# EAGLE board Venus_GPS_logger-sma-Panel-v10 (EAGLE 6.5.0), part 1 of 3
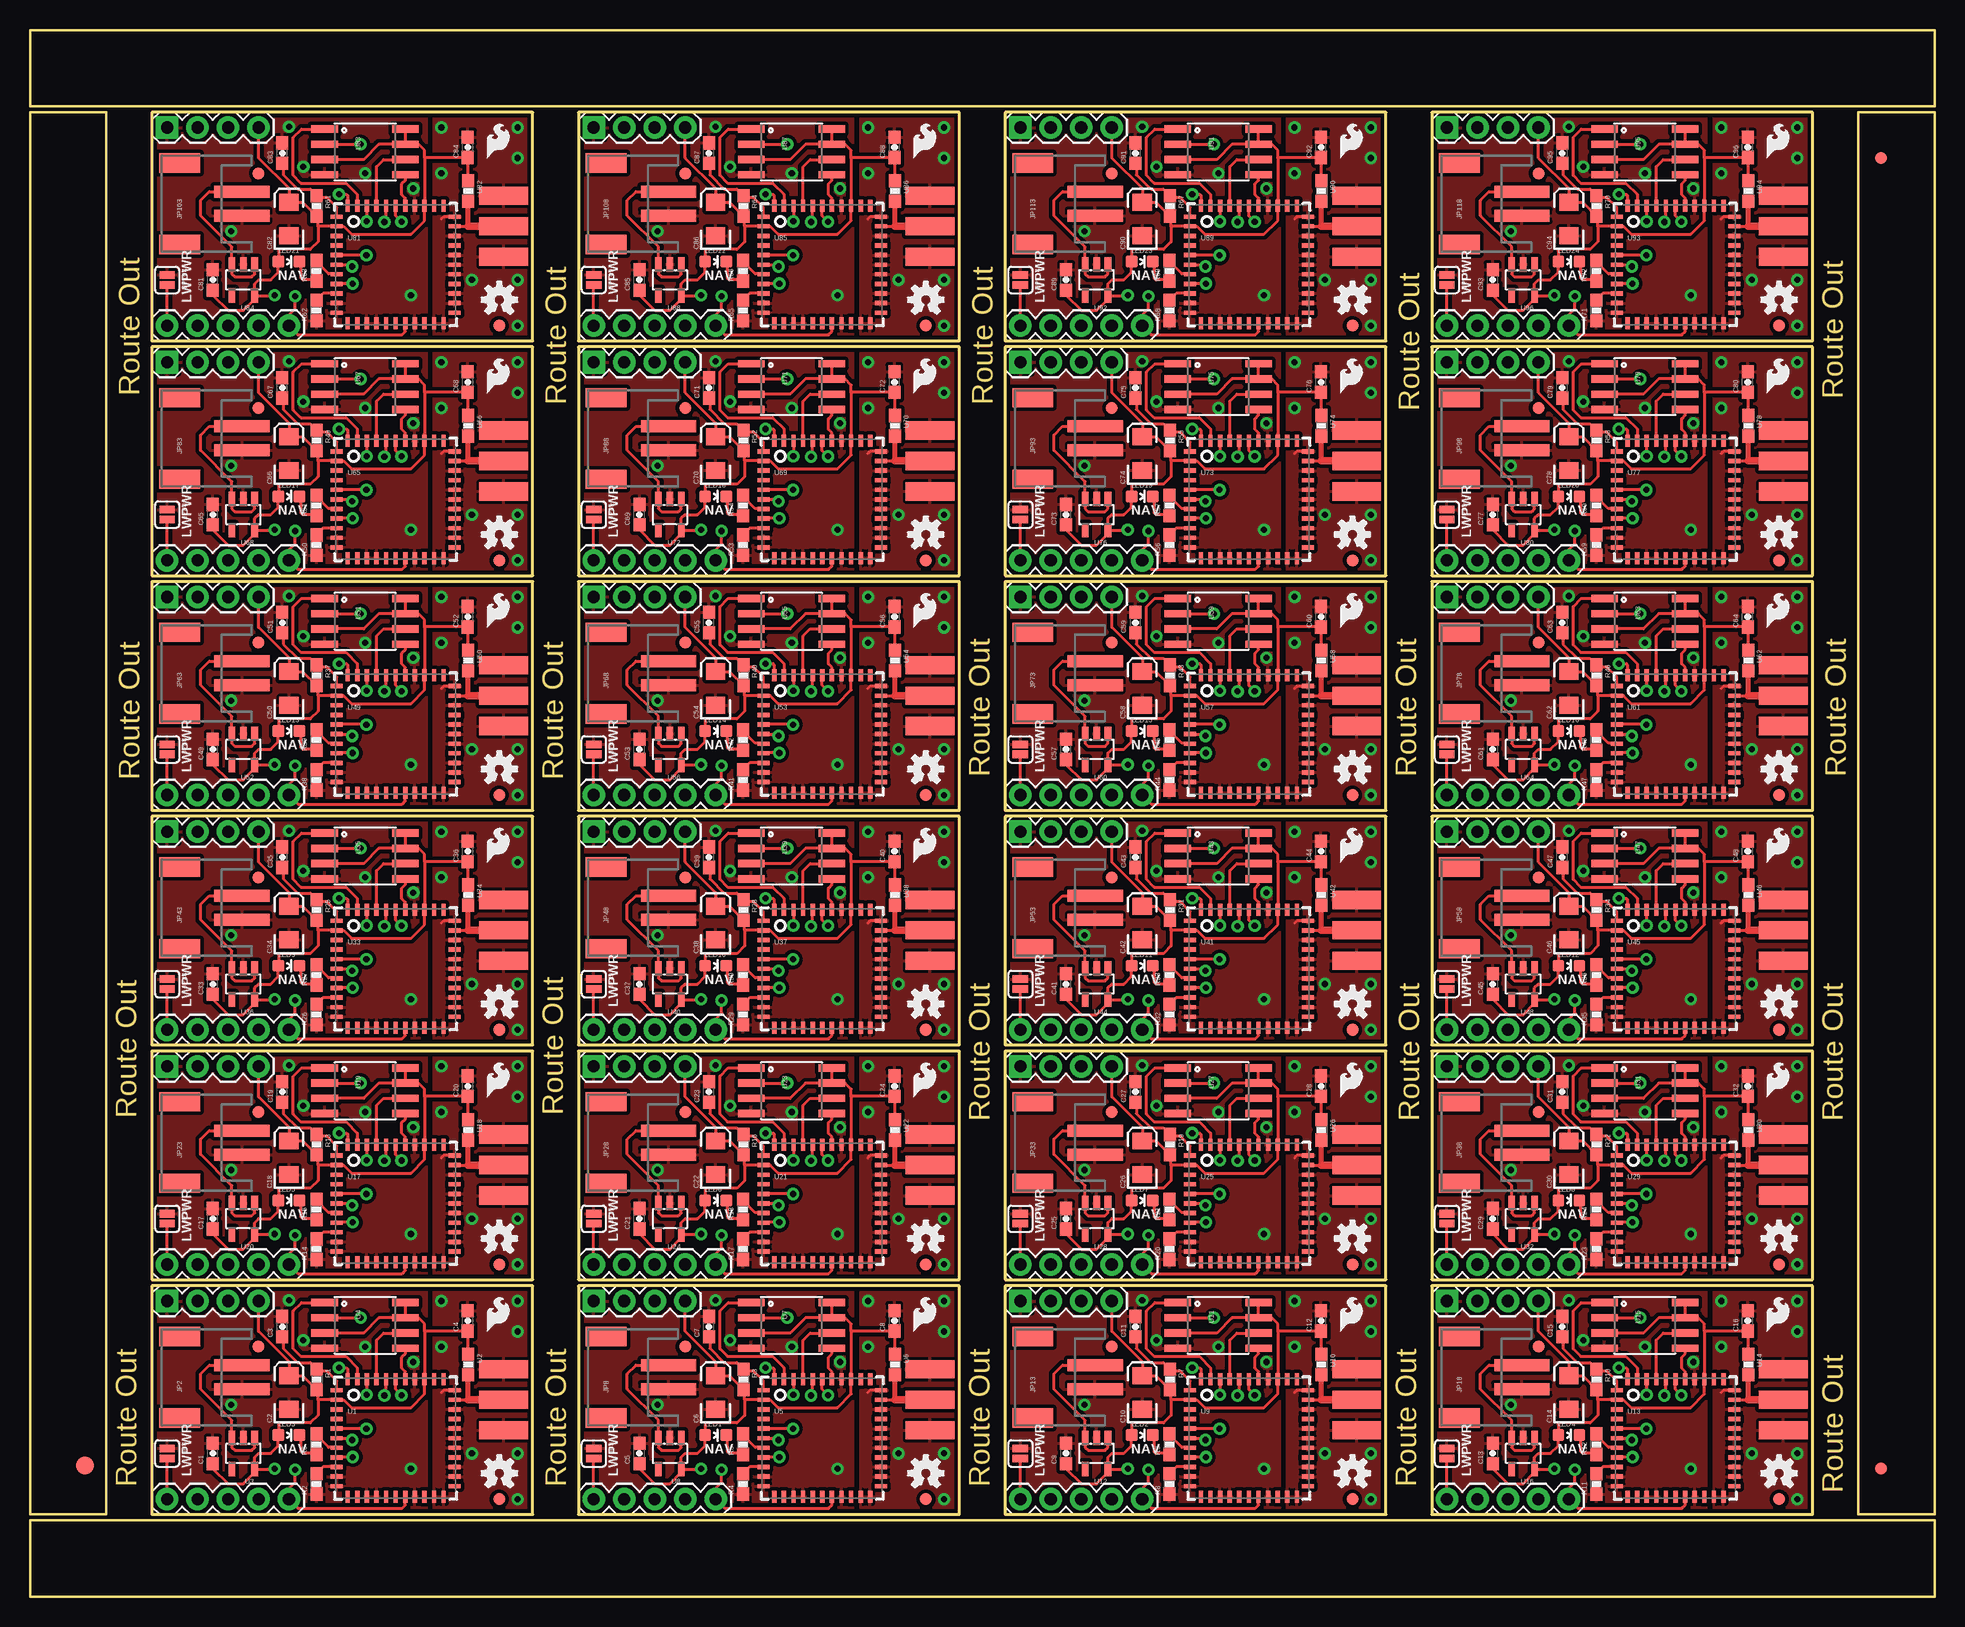
[diagram p0: board, top side]
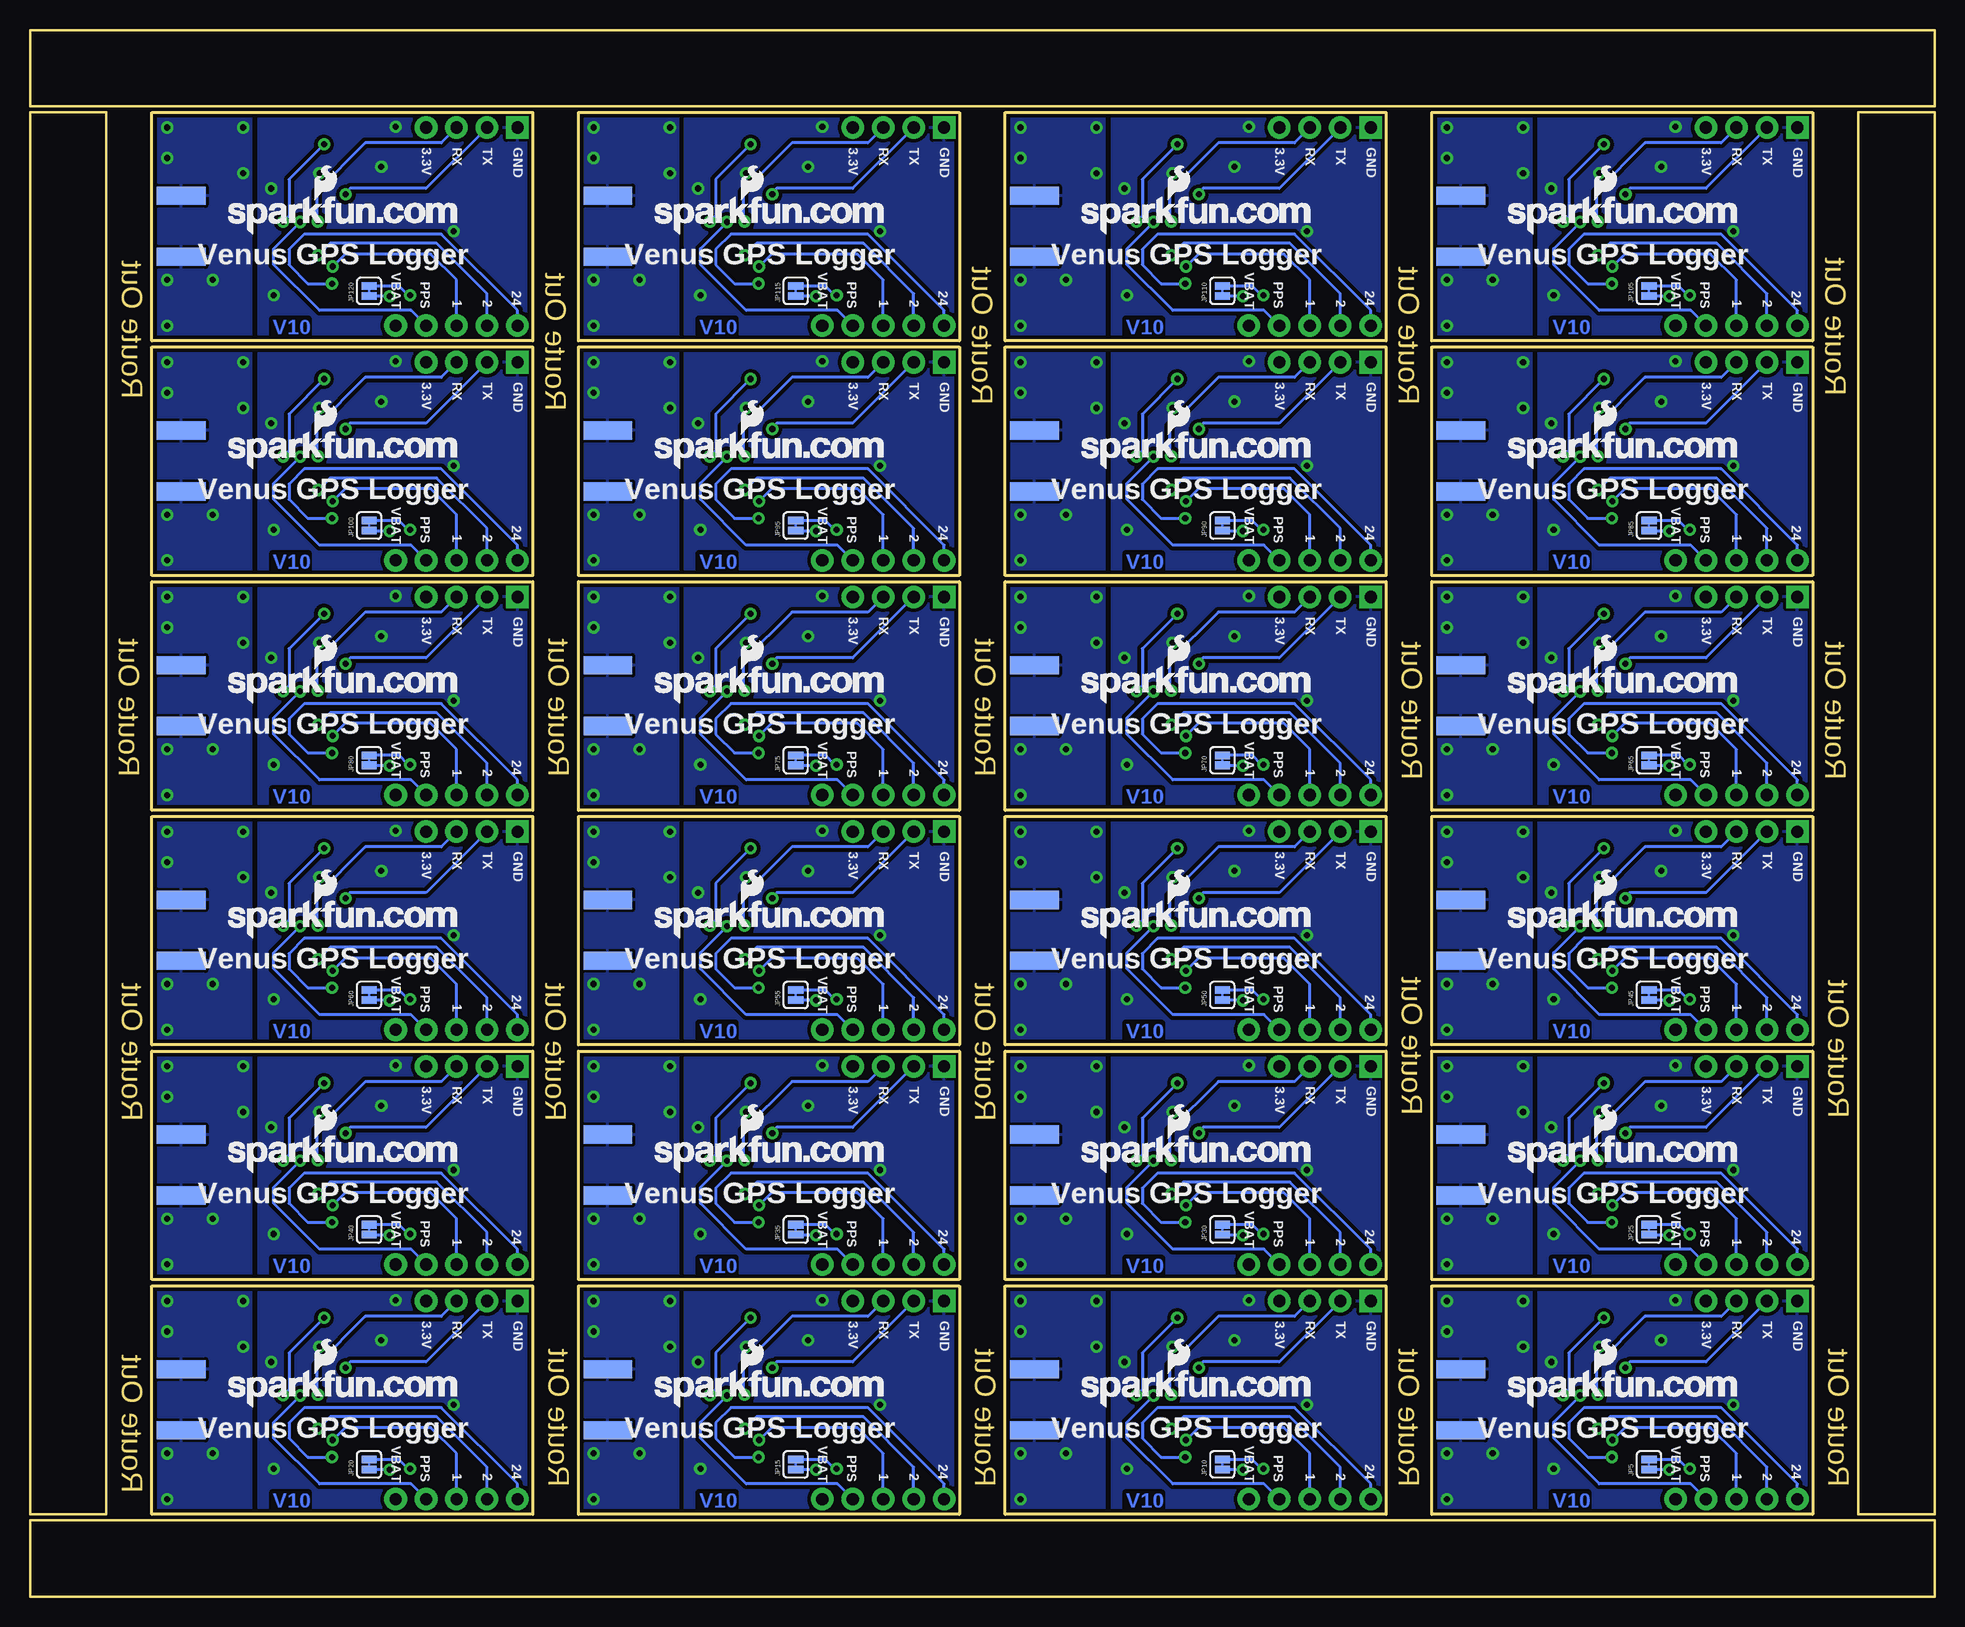
[diagram p1: board, bottom side, seen from below]

Size 158.75 x 130.56 mm. Coordinates in mm from the lower left corner, seen from the top.
Outline: 10.16,6.86 41.91,6.86 41.91,25.91 10.16,25.91 10.16,6.86
Outline: 45.72,6.86 77.47,6.86 77.47,25.91 45.72,25.91 45.72,6.86
Outline: 81.28,6.86 113.03,6.86 113.03,25.91 81.28,25.91 81.28,6.86
Outline: 116.84,6.86 148.59,6.86 148.59,25.91 116.84,25.91 116.84,6.86
Outline: 10.16,26.42 41.91,26.42 41.91,45.47 10.16,45.47 10.16,26.42
Outline: 45.72,26.42 77.47,26.42 77.47,45.47 45.72,45.47 45.72,26.42
Outline: 81.28,26.42 113.03,26.42 113.03,45.47 81.28,45.47 81.28,26.42
Outline: 116.84,26.42 148.59,26.42 148.59,45.47 116.84,45.47 116.84,26.42
Outline: 10.16,45.97 41.91,45.97 41.91,65.02 10.16,65.02 10.16,45.97
Outline: 45.72,45.97 77.47,45.97 77.47,65.02 45.72,65.02 45.72,45.97
Outline: 81.28,45.97 113.03,45.97 113.03,65.02 81.28,65.02 81.28,45.97
Outline: 116.84,45.97 148.59,45.97 148.59,65.02 116.84,65.02 116.84,45.97
Outline: 10.16,65.53 41.91,65.53 41.91,84.58 10.16,84.58 10.16,65.53
Outline: 45.72,65.53 77.47,65.53 77.47,84.58 45.72,84.58 45.72,65.53
Outline: 81.28,65.53 113.03,65.53 113.03,84.58 81.28,84.58 81.28,65.53
Outline: 116.84,65.53 148.59,65.53 148.59,84.58 116.84,84.58 116.84,65.53
Outline: 10.16,85.09 41.91,85.09 41.91,104.14 10.16,104.14 10.16,85.09
Outline: 45.72,85.09 77.47,85.09 77.47,104.14 45.72,104.14 45.72,85.09
Outline: 81.28,85.09 113.03,85.09 113.03,104.14 81.28,104.14 81.28,85.09
Outline: 116.84,85.09 148.59,85.09 148.59,104.14 116.84,104.14 116.84,85.09
Outline: 10.16,104.65 41.91,104.65 41.91,123.7 10.16,123.7 10.16,104.65
Outline: 45.72,104.65 77.47,104.65 77.47,123.7 45.72,123.7 45.72,104.65
Outline: 81.28,104.65 113.03,104.65 113.03,123.7 81.28,123.7 81.28,104.65
Outline: 116.84,104.65 148.59,104.65 148.59,123.7 116.84,123.7 116.84,104.65
Outline: 6.35,6.86 6.35,123.7 0,123.7 0,6.86 6.35,6.86
Outline: 152.4,123.7 152.4,6.86 158.75,6.86 158.75,123.7 152.4,123.7
Outline: 158.75,6.35 0,6.35 0,0 158.75,0 158.75,6.35
Outline: 0,124.21 158.75,124.21 158.75,130.56 0,130.56 0,124.21
Copper layers (1*16): Top 0.035mm / dielectric 1.5mm / Bottom 0.035mm
Design rules "SparkFun-2-layer": minimum track width 7mil, minimum drill 15mil, track to track 8mil, track to pad 8mil, pad to pad 8mil, via to via 8mil, smd to smd 8mil, copper to edge 8mil, drill to drill 8mil, minimum pad ring 12mil, minimum via ring 10mil, stop-mask expansion 4mil, vias tented up to drill 20mil, thermal gap 10mil

## Footprints (pad centres in the part's own frame; a part is rotated, then mirrored left to right if it is on the bottom)
0603-CAP = smd 1.1 x 1: 1 -0.85,0; 2 0.85,0
EIA3216 = smd 1.4 x 1.6: A 1.4,0; C -1.4,0
FIDUCIAL-1.5X3 = smd 1.5 x 1.5: 1 0,0
FIDUCIAL-1X2 = smd 1 x 1: 1 0,0
SMA-EDGE = smd 1.524 x 4.064: GND@0 0,0; GND@1 5.08,0; SIG 2.54,0 | smd 1.524 x 4.064 bottom: GND@2 0,0; GND@3 5.08,0
1X04 = drill 1.016 pad 1.88 square: 1 0,0 | drill 1.016 pad 1.88: 2 2.54,0; 3 5.08,0; 4 7.62,0
S2B-PH = smd 1 x 4.6: 1 -1,-3.7; 2 1,-3.7 | smd 1.6 x 3.4: NC1 -3.4,1.5; NC2 3.4,1.5
1X05 = drill 1.016 pad 1.88: 1 0,0; 2 2.54,0; 3 5.08,0; 4 7.62,0; 5 10.16,0
SJ_2S = smd 0.635 x 1.27: 1 -0.412,0; 2 0.412,0
LED-0603 = smd 1 x 1: A 0,-0.877; C 0,0.877
0603-RES = smd 1.1 x 1: 1 -0.85,0; 2 0.85,0
LGA44 = smd 1 x 0.36: 1 -4.9,4; 2 -4.9,3.2; 3 -4.9,2.4; 4 -4.9,1.6; 5 -4.9,0.8; 6 -4.9,0; 7 -4.9,-0.8; 8 -4.9,-1.6; 9 -4.9,-2.4; 10 -4.9,-3.2; 11 -4.9,-4; 23 4.9,-4; 24 4.9,-3.2; 25 4.9,-2.4; 26 4.9,-1.6; 27 4.9,-0.8; 28 4.9,0; 29 4.9,0.8; 30 4.9,1.6; 31 4.9,2.4; 32 4.9,3.2; 33 4.9,4 | smd 0.36 x 1: 12 -4,-4.9; 13 -3.2,-4.9; 14 -2.4,-4.9; 15 -1.6,-4.9; 16 -0.8,-4.9; 17 0,-4.9; 18 0.8,-4.9; 19 1.6,-4.9; 20 2.4,-4.9; 21 3.2,-4.9; 22 4,-4.9; 34 4,4.9; 35 3.2,4.9; 36 2.4,4.9; 37 1.6,4.9; 38 0.8,4.9; 39 0,4.9; 40 -0.8,4.9; 41 -1.6,4.9; 42 -2.4,4.9; 43 -3.2,4.9; 44 -4,4.9
SOT23-5 = smd 0.55 x 1.2: 1 -0.95,-1.3; 2 0,-1.3; 3 0.95,-1.3; 4 0.95,1.3; 5 -0.95,1.3
SO08-EIAJ = smd 0.61 x 2.21: 1 -1.905,-3.378; 2 -0.635,-3.378; 3 0.635,-3.378; 4 1.905,-3.378; 5 1.905,3.353; 6 0.635,3.353; 7 -0.635,3.353; 8 -1.905,3.353

## Placement (x,y rotation side)
C1  0.1uF  [0603-CAP]  15.24,11.94 90 top
C2  10uF  [EIA3216]  21.59,17.02 90 top
C3  1uF  [0603-CAP]  21.03,22.5 90 top
C4  22pF  [0603-CAP]  36.5,22.99 90 top
C5  0.1uF  [0603-CAP]  50.8,11.94 90 top
C6  10uF  [EIA3216]  57.15,17.02 90 top
C7  1uF  [0603-CAP]  56.59,22.5 90 top
C8  22pF  [0603-CAP]  72.06,22.99 90 top
C9  0.1uF  [0603-CAP]  86.36,11.94 90 top
C10  10uF  [EIA3216]  92.71,17.02 90 top
C11  1uF  [0603-CAP]  92.15,22.5 90 top
C12  22pF  [0603-CAP]  107.62,22.99 90 top
C13  0.1uF  [0603-CAP]  121.92,11.94 90 top
C14  10uF  [EIA3216]  128.27,17.02 90 top
C15  1uF  [0603-CAP]  127.71,22.5 90 top
C16  22pF  [0603-CAP]  143.18,22.99 90 top
C17  0.1uF  [0603-CAP]  15.24,31.5 90 top
C18  10uF  [EIA3216]  21.59,36.58 90 top
C19  1uF  [0603-CAP]  21.03,42.06 90 top
C20  22pF  [0603-CAP]  36.5,42.55 90 top
C21  0.1uF  [0603-CAP]  50.8,31.5 90 top
C22  10uF  [EIA3216]  57.15,36.58 90 top
C23  1uF  [0603-CAP]  56.59,42.06 90 top
C24  22pF  [0603-CAP]  72.06,42.55 90 top
C25  0.1uF  [0603-CAP]  86.36,31.5 90 top
C26  10uF  [EIA3216]  92.71,36.58 90 top
C27  1uF  [0603-CAP]  92.15,42.06 90 top
C28  22pF  [0603-CAP]  107.62,42.55 90 top
C29  0.1uF  [0603-CAP]  121.92,31.5 90 top
C30  10uF  [EIA3216]  128.27,36.58 90 top
C31  1uF  [0603-CAP]  127.71,42.06 90 top
C32  22pF  [0603-CAP]  143.18,42.55 90 top
C33  0.1uF  [0603-CAP]  15.24,51.05 90 top
C34  10uF  [EIA3216]  21.59,56.13 90 top
C35  1uF  [0603-CAP]  21.03,61.62 90 top
C36  22pF  [0603-CAP]  36.5,62.1 90 top
C37  0.1uF  [0603-CAP]  50.8,51.05 90 top
C38  10uF  [EIA3216]  57.15,56.13 90 top
C39  1uF  [0603-CAP]  56.59,61.62 90 top
C40  22pF  [0603-CAP]  72.06,62.1 90 top
C41  0.1uF  [0603-CAP]  86.36,51.05 90 top
C42  10uF  [EIA3216]  92.71,56.13 90 top
C43  1uF  [0603-CAP]  92.15,61.62 90 top
C44  22pF  [0603-CAP]  107.62,62.1 90 top
C45  0.1uF  [0603-CAP]  121.92,51.05 90 top
C46  10uF  [EIA3216]  128.27,56.13 90 top
C47  1uF  [0603-CAP]  127.71,61.62 90 top
C48  22pF  [0603-CAP]  143.18,62.1 90 top
C49  0.1uF  [0603-CAP]  15.24,70.61 90 top
C50  10uF  [EIA3216]  21.59,75.69 90 top
C51  1uF  [0603-CAP]  21.03,81.18 90 top
C52  22pF  [0603-CAP]  36.5,81.66 90 top
C53  0.1uF  [0603-CAP]  50.8,70.61 90 top
C54  10uF  [EIA3216]  57.15,75.69 90 top
C55  1uF  [0603-CAP]  56.59,81.18 90 top
C56  22pF  [0603-CAP]  72.06,81.66 90 top
C57  0.1uF  [0603-CAP]  86.36,70.61 90 top
C58  10uF  [EIA3216]  92.71,75.69 90 top
C59  1uF  [0603-CAP]  92.15,81.18 90 top
C60  22pF  [0603-CAP]  107.62,81.66 90 top
C61  0.1uF  [0603-CAP]  121.92,70.61 90 top
C62  10uF  [EIA3216]  128.27,75.69 90 top
C63  1uF  [0603-CAP]  127.71,81.18 90 top
C64  22pF  [0603-CAP]  143.18,81.66 90 top
C65  0.1uF  [0603-CAP]  15.24,90.17 90 top
C66  10uF  [EIA3216]  21.59,95.25 90 top
C67  1uF  [0603-CAP]  21.03,100.74 90 top
C68  22pF  [0603-CAP]  36.5,101.22 90 top
C69  0.1uF  [0603-CAP]  50.8,90.17 90 top
C70  10uF  [EIA3216]  57.15,95.25 90 top
C71  1uF  [0603-CAP]  56.59,100.74 90 top
C72  22pF  [0603-CAP]  72.06,101.22 90 top
C73  0.1uF  [0603-CAP]  86.36,90.17 90 top
C74  10uF  [EIA3216]  92.71,95.25 90 top
C75  1uF  [0603-CAP]  92.15,100.74 90 top
C76  22pF  [0603-CAP]  107.62,101.22 90 top
C77  0.1uF  [0603-CAP]  121.92,90.17 90 top
C78  10uF  [EIA3216]  128.27,95.25 90 top
C79  1uF  [0603-CAP]  127.71,100.74 90 top
C80  22pF  [0603-CAP]  143.18,101.22 90 top
C81  0.1uF  [0603-CAP]  15.24,109.73 90 top
C82  10uF  [EIA3216]  21.59,114.81 90 top
C83  1uF  [0603-CAP]  21.03,120.29 90 top
C84  22pF  [0603-CAP]  36.5,120.78 90 top
C85  0.1uF  [0603-CAP]  50.8,109.73 90 top
C86  10uF  [EIA3216]  57.15,114.81 90 top
C87  1uF  [0603-CAP]  56.59,120.29 90 top
C88  22pF  [0603-CAP]  72.06,120.78 90 top
C89  0.1uF  [0603-CAP]  86.36,109.73 90 top
C90  10uF  [EIA3216]  92.71,114.81 90 top
C91  1uF  [0603-CAP]  92.15,120.29 90 top
C92  22pF  [0603-CAP]  107.62,120.78 90 top
C93  0.1uF  [0603-CAP]  121.92,109.73 90 top
C94  10uF  [EIA3216]  128.27,114.81 90 top
C95  1uF  [0603-CAP]  127.71,120.29 90 top
C96  22pF  [0603-CAP]  143.18,120.78 90 top
E$1  [FIDUCIAL-1.5X3]  4.57,10.92 0 top
E$3  [FIDUCIAL-1X2]  154.31,119.89 180 top
E$4  [FIDUCIAL-1X2]  154.31,10.67 0 top
FID1  FIDUCIAL1X2  [FIDUCIAL-1X2]  39.12,8.13 0 top
FID2  FIDUCIAL1X2  [FIDUCIAL-1X2]  19.05,20.83 0 top
FID3  FIDUCIAL1X2  [FIDUCIAL-1X2]  74.68,8.13 0 top
FID4  FIDUCIAL1X2  [FIDUCIAL-1X2]  54.61,20.83 0 top
FID5  FIDUCIAL1X2  [FIDUCIAL-1X2]  110.24,8.13 0 top
FID6  FIDUCIAL1X2  [FIDUCIAL-1X2]  90.17,20.83 0 top
FID7  FIDUCIAL1X2  [FIDUCIAL-1X2]  145.8,8.13 0 top
FID8  FIDUCIAL1X2  [FIDUCIAL-1X2]  125.73,20.83 0 top
FID9  FIDUCIAL1X2  [FIDUCIAL-1X2]  39.12,27.69 0 top
FID10  FIDUCIAL1X2  [FIDUCIAL-1X2]  19.05,40.39 0 top
FID11  FIDUCIAL1X2  [FIDUCIAL-1X2]  74.68,27.69 0 top
FID12  FIDUCIAL1X2  [FIDUCIAL-1X2]  54.61,40.39 0 top
FID13  FIDUCIAL1X2  [FIDUCIAL-1X2]  110.24,27.69 0 top
FID14  FIDUCIAL1X2  [FIDUCIAL-1X2]  90.17,40.39 0 top
FID15  FIDUCIAL1X2  [FIDUCIAL-1X2]  145.8,27.69 0 top
FID16  FIDUCIAL1X2  [FIDUCIAL-1X2]  125.73,40.39 0 top
FID17  FIDUCIAL1X2  [FIDUCIAL-1X2]  39.12,47.24 0 top
FID18  FIDUCIAL1X2  [FIDUCIAL-1X2]  19.05,59.94 0 top
FID19  FIDUCIAL1X2  [FIDUCIAL-1X2]  74.68,47.24 0 top
FID20  FIDUCIAL1X2  [FIDUCIAL-1X2]  54.61,59.94 0 top
FID21  FIDUCIAL1X2  [FIDUCIAL-1X2]  110.24,47.24 0 top
FID22  FIDUCIAL1X2  [FIDUCIAL-1X2]  90.17,59.94 0 top
FID23  FIDUCIAL1X2  [FIDUCIAL-1X2]  145.8,47.24 0 top
FID24  FIDUCIAL1X2  [FIDUCIAL-1X2]  125.73,59.94 0 top
FID25  FIDUCIAL1X2  [FIDUCIAL-1X2]  39.12,66.8 0 top
FID26  FIDUCIAL1X2  [FIDUCIAL-1X2]  19.05,79.5 0 top
FID27  FIDUCIAL1X2  [FIDUCIAL-1X2]  74.68,66.8 0 top
FID28  FIDUCIAL1X2  [FIDUCIAL-1X2]  54.61,79.5 0 top
FID29  FIDUCIAL1X2  [FIDUCIAL-1X2]  110.24,66.8 0 top
FID30  FIDUCIAL1X2  [FIDUCIAL-1X2]  90.17,79.5 0 top
FID31  FIDUCIAL1X2  [FIDUCIAL-1X2]  145.8,66.8 0 top
FID32  FIDUCIAL1X2  [FIDUCIAL-1X2]  125.73,79.5 0 top
FID33  FIDUCIAL1X2  [FIDUCIAL-1X2]  39.12,86.36 0 top
FID34  FIDUCIAL1X2  [FIDUCIAL-1X2]  19.05,99.06 0 top
FID35  FIDUCIAL1X2  [FIDUCIAL-1X2]  74.68,86.36 0 top
FID36  FIDUCIAL1X2  [FIDUCIAL-1X2]  54.61,99.06 0 top
FID37  FIDUCIAL1X2  [FIDUCIAL-1X2]  110.24,86.36 0 top
FID38  FIDUCIAL1X2  [FIDUCIAL-1X2]  90.17,99.06 0 top
FID39  FIDUCIAL1X2  [FIDUCIAL-1X2]  145.8,86.36 0 top
FID40  FIDUCIAL1X2  [FIDUCIAL-1X2]  125.73,99.06 0 top
FID41  FIDUCIAL1X2  [FIDUCIAL-1X2]  39.12,105.92 0 top
FID42  FIDUCIAL1X2  [FIDUCIAL-1X2]  19.05,118.62 0 top
FID43  FIDUCIAL1X2  [FIDUCIAL-1X2]  74.68,105.92 0 top
FID44  FIDUCIAL1X2  [FIDUCIAL-1X2]  54.61,118.62 0 top
FID45  FIDUCIAL1X2  [FIDUCIAL-1X2]  110.24,105.92 0 top
FID46  FIDUCIAL1X2  [FIDUCIAL-1X2]  90.17,118.62 0 top
FID47  FIDUCIAL1X2  [FIDUCIAL-1X2]  145.8,105.92 0 top
FID48  FIDUCIAL1X2  [FIDUCIAL-1X2]  125.73,118.62 0 top
J$1  SMA_EDGE  [SMA-EDGE]  39.47,13.87 90 top
J$2  SMA_EDGE  [SMA-EDGE]  75.03,13.87 90 top
J$3  SMA_EDGE  [SMA-EDGE]  110.59,13.87 90 top
J$4  SMA_EDGE  [SMA-EDGE]  146.15,13.87 90 top
J$5  SMA_EDGE  [SMA-EDGE]  39.47,33.43 90 top
J$6  SMA_EDGE  [SMA-EDGE]  75.03,33.43 90 top
J$7  SMA_EDGE  [SMA-EDGE]  110.59,33.43 90 top
J$8  SMA_EDGE  [SMA-EDGE]  146.15,33.43 90 top
J$9  SMA_EDGE  [SMA-EDGE]  39.47,52.99 90 top
J$10  SMA_EDGE  [SMA-EDGE]  75.03,52.99 90 top
J$11  SMA_EDGE  [SMA-EDGE]  110.59,52.99 90 top
J$12  SMA_EDGE  [SMA-EDGE]  146.15,52.99 90 top
J$13  SMA_EDGE  [SMA-EDGE]  39.47,72.55 90 top
J$14  SMA_EDGE  [SMA-EDGE]  75.03,72.55 90 top
J$15  SMA_EDGE  [SMA-EDGE]  110.59,72.55 90 top
J$16  SMA_EDGE  [SMA-EDGE]  146.15,72.55 90 top
J$17  SMA_EDGE  [SMA-EDGE]  39.47,92.1 90 top
J$18  SMA_EDGE  [SMA-EDGE]  75.03,92.1 90 top
J$19  SMA_EDGE  [SMA-EDGE]  110.59,92.1 90 top
J$20  SMA_EDGE  [SMA-EDGE]  146.15,92.1 90 top
J$21  SMA_EDGE  [SMA-EDGE]  39.47,111.66 90 top
J$22  SMA_EDGE  [SMA-EDGE]  75.03,111.66 90 top
J$23  SMA_EDGE  [SMA-EDGE]  110.59,111.66 90 top
J$24  SMA_EDGE  [SMA-EDGE]  146.15,111.66 90 top
JP1  UART  [1X04]  11.43,24.64 0 top
JP2  Battery  [S2B-PH]  13.97,18.29 90 top
JP3  General  [1X05]  21.59,8.13 180 top
JP4  Low Power Mode  [SJ_2S]  11.43,11.94 270 top
JP5  VBAT Select  [SJ_2S]  23.8,11.02 90 bottom
JP6  UART  [1X04]  46.99,24.64 0 top
JP7  General  [1X05]  57.15,8.13 180 top
JP8  Battery  [S2B-PH]  49.53,18.29 90 top
JP9  Low Power Mode  [SJ_2S]  46.99,11.94 270 top
JP10  VBAT Select  [SJ_2S]  59.36,11.02 90 bottom
JP11  UART  [1X04]  82.55,24.64 0 top
JP12  General  [1X05]  92.71,8.13 180 top
JP13  Battery  [S2B-PH]  85.09,18.29 90 top
JP14  Low Power Mode  [SJ_2S]  82.55,11.94 270 top
JP15  VBAT Select  [SJ_2S]  94.92,11.02 90 bottom
JP16  UART  [1X04]  118.11,24.64 0 top
JP17  General  [1X05]  128.27,8.13 180 top
JP18  Battery  [S2B-PH]  120.65,18.29 90 top
JP19  Low Power Mode  [SJ_2S]  118.11,11.94 270 top
JP20  VBAT Select  [SJ_2S]  130.48,11.02 90 bottom
JP21  UART  [1X04]  11.43,44.2 0 top
JP22  General  [1X05]  21.59,27.69 180 top
JP23  Battery  [S2B-PH]  13.97,37.85 90 top
JP24  Low Power Mode  [SJ_2S]  11.43,31.5 270 top
JP25  VBAT Select  [SJ_2S]  23.8,30.58 90 bottom
JP26  UART  [1X04]  46.99,44.2 0 top
JP27  General  [1X05]  57.15,27.69 180 top
JP28  Battery  [S2B-PH]  49.53,37.85 90 top
JP29  Low Power Mode  [SJ_2S]  46.99,31.5 270 top
JP30  VBAT Select  [SJ_2S]  59.36,30.58 90 bottom
JP31  UART  [1X04]  82.55,44.2 0 top
JP32  General  [1X05]  92.71,27.69 180 top
JP33  Battery  [S2B-PH]  85.09,37.85 90 top
JP34  Low Power Mode  [SJ_2S]  82.55,31.5 270 top
JP35  VBAT Select  [SJ_2S]  94.92,30.58 90 bottom
JP36  UART  [1X04]  118.11,44.2 0 top
JP37  General  [1X05]  128.27,27.69 180 top
JP38  Battery  [S2B-PH]  120.65,37.85 90 top
JP39  Low Power Mode  [SJ_2S]  118.11,31.5 270 top
JP40  VBAT Select  [SJ_2S]  130.48,30.58 90 bottom
JP41  UART  [1X04]  11.43,63.75 0 top
JP42  General  [1X05]  21.59,47.24 180 top
JP43  Battery  [S2B-PH]  13.97,57.4 90 top
JP44  Low Power Mode  [SJ_2S]  11.43,51.05 270 top
JP45  VBAT Select  [SJ_2S]  23.8,50.14 90 bottom
JP46  UART  [1X04]  46.99,63.75 0 top
JP47  General  [1X05]  57.15,47.24 180 top
JP48  Battery  [S2B-PH]  49.53,57.4 90 top
JP49  Low Power Mode  [SJ_2S]  46.99,51.05 270 top
JP50  VBAT Select  [SJ_2S]  59.36,50.14 90 bottom
JP51  UART  [1X04]  82.55,63.75 0 top
JP52  General  [1X05]  92.71,47.24 180 top
JP53  Battery  [S2B-PH]  85.09,57.4 90 top
JP54  Low Power Mode  [SJ_2S]  82.55,51.05 270 top
JP55  VBAT Select  [SJ_2S]  94.92,50.14 90 bottom
JP56  UART  [1X04]  118.11,63.75 0 top
JP57  General  [1X05]  128.27,47.24 180 top
JP58  Battery  [S2B-PH]  120.65,57.4 90 top
JP59  Low Power Mode  [SJ_2S]  118.11,51.05 270 top
JP60  VBAT Select  [SJ_2S]  130.48,50.14 90 bottom
JP61  UART  [1X04]  11.43,83.31 0 top
JP62  General  [1X05]  21.59,66.8 180 top
JP63  Battery  [S2B-PH]  13.97,76.96 90 top
JP64  Low Power Mode  [SJ_2S]  11.43,70.61 270 top
JP65  VBAT Select  [SJ_2S]  23.8,69.7 90 bottom
JP66  UART  [1X04]  46.99,83.31 0 top
JP67  General  [1X05]  57.15,66.8 180 top
JP68  Battery  [S2B-PH]  49.53,76.96 90 top
JP69  Low Power Mode  [SJ_2S]  46.99,70.61 270 top
JP70  VBAT Select  [SJ_2S]  59.36,69.7 90 bottom
JP71  UART  [1X04]  82.55,83.31 0 top
JP72  General  [1X05]  92.71,66.8 180 top
JP73  Battery  [S2B-PH]  85.09,76.96 90 top
JP74  Low Power Mode  [SJ_2S]  82.55,70.61 270 top
JP75  VBAT Select  [SJ_2S]  94.92,69.7 90 bottom
JP76  UART  [1X04]  118.11,83.31 0 top
JP77  General  [1X05]  128.27,66.8 180 top
JP78  Battery  [S2B-PH]  120.65,76.96 90 top
JP79  Low Power Mode  [SJ_2S]  118.11,70.61 270 top
JP80  VBAT Select  [SJ_2S]  130.48,69.7 90 bottom
JP81  UART  [1X04]  11.43,102.87 0 top
JP82  General  [1X05]  21.59,86.36 180 top
JP83  Battery  [S2B-PH]  13.97,96.52 90 top
JP84  Low Power Mode  [SJ_2S]  11.43,90.17 270 top
JP85  VBAT Select  [SJ_2S]  23.8,89.26 90 bottom
JP86  UART  [1X04]  46.99,102.87 0 top
JP87  General  [1X05]  57.15,86.36 180 top
JP88  Battery  [S2B-PH]  49.53,96.52 90 top
JP89  Low Power Mode  [SJ_2S]  46.99,90.17 270 top
JP90  VBAT Select  [SJ_2S]  59.36,89.26 90 bottom
JP91  UART  [1X04]  82.55,102.87 0 top
JP92  General  [1X05]  92.71,86.36 180 top
JP93  Battery  [S2B-PH]  85.09,96.52 90 top
JP94  Low Power Mode  [SJ_2S]  82.55,90.17 270 top
JP95  VBAT Select  [SJ_2S]  94.92,89.26 90 bottom
JP96  UART  [1X04]  118.11,102.87 0 top
JP97  General  [1X05]  128.27,86.36 180 top
JP98  Battery  [S2B-PH]  120.65,96.52 90 top
JP99  Low Power Mode  [SJ_2S]  118.11,90.17 270 top
JP100  VBAT Select  [SJ_2S]  130.48,89.26 90 bottom
JP101  UART  [1X04]  11.43,122.43 0 top
JP102  General  [1X05]  21.59,105.92 180 top
JP103  Battery  [S2B-PH]  13.97,116.08 90 top
JP104  Low Power Mode  [SJ_2S]  11.43,109.73 270 top
JP105  VBAT Select  [SJ_2S]  23.8,108.81 90 bottom
JP106  UART  [1X04]  46.99,122.43 0 top
JP107  General  [1X05]  57.15,105.92 180 top
JP108  Battery  [S2B-PH]  49.53,116.08 90 top
JP109  Low Power Mode  [SJ_2S]  46.99,109.73 270 top
JP110  VBAT Select  [SJ_2S]  59.36,108.81 90 bottom
JP111  UART  [1X04]  82.55,122.43 0 top
JP112  General  [1X05]  92.71,105.92 180 top
JP113  Battery  [S2B-PH]  85.09,116.08 90 top
JP114  Low Power Mode  [SJ_2S]  82.55,109.73 270 top
JP115  VBAT Select  [SJ_2S]  94.92,108.81 90 bottom
JP116  UART  [1X04]  118.11,122.43 0 top
JP117  General  [1X05]  128.27,105.92 180 top
JP118  Battery  [S2B-PH]  120.65,116.08 90 top
JP119  Low Power Mode  [SJ_2S]  118.11,109.73 270 top
JP120  VBAT Select  [SJ_2S]  130.48,108.81 90 bottom
LED1  Green  [LED-0603]  57.15,13.46 270 top
LED2  Green  [LED-0603]  92.71,13.46 270 top
LED3  Green  [LED-0603]  21.59,13.46 270 top
LED4  Green  [LED-0603]  128.27,13.46 270 top
LED5  Green  [LED-0603]  21.59,33.02 270 top
LED6  Green  [LED-0603]  57.15,33.02 270 top
LED7  Green  [LED-0603]  92.71,33.02 270 top
LED8  Green  [LED-0603]  128.27,33.02 270 top
LED9  Green  [LED-0603]  21.59,52.58 270 top
LED10  Green  [LED-0603]  57.15,52.58 270 top
LED11  Green  [LED-0603]  92.71,52.58 270 top
LED12  Green  [LED-0603]  128.27,52.58 270 top
LED13  Green  [LED-0603]  21.59,72.14 270 top
LED14  Green  [LED-0603]  57.15,72.14 270 top
LED15  Green  [LED-0603]  92.71,72.14 270 top
LED16  Green  [LED-0603]  128.27,72.14 270 top
LED17  Green  [LED-0603]  21.59,91.69 270 top
LED18  Green  [LED-0603]  57.15,91.69 270 top
LED19  Green  [LED-0603]  92.71,91.69 270 top
LED20  Green  [LED-0603]  128.27,91.69 270 top
LED21  Green  [LED-0603]  21.59,111.25 270 top
LED22  Green  [LED-0603]  57.15,111.25 270 top
LED23  Green  [LED-0603]  92.71,111.25 270 top
LED24  Green  [LED-0603]  128.27,111.25 270 top
R1  33k  [0603-RES]  23.9,18.11 270 top
R2  10k  [0603-RES]  23.88,9.4 90 top
R3  33k  [0603-RES]  59.46,18.11 270 top
R4  10k  [0603-RES]  59.44,9.4 90 top
R5  330  [0603-RES]  59.44,12.7 90 top
R6  330  [0603-RES]  23.88,12.7 90 top
R7  33k  [0603-RES]  95.02,18.11 270 top
R8  10k  [0603-RES]  95,9.4 90 top
R9  330  [0603-RES]  95,12.7 90 top
R10  33k  [0603-RES]  130.58,18.11 270 top
R11  10k  [0603-RES]  130.56,9.4 90 top
R12  330  [0603-RES]  130.56,12.7 90 top
R13  33k  [0603-RES]  23.9,37.67 270 top
R14  10k  [0603-RES]  23.88,28.96 90 top
R15  330  [0603-RES]  23.88,32.26 90 top
R16  33k  [0603-RES]  59.46,37.67 270 top
R17  10k  [0603-RES]  59.44,28.96 90 top
R18  330  [0603-RES]  59.44,32.26 90 top
R19  33k  [0603-RES]  95.02,37.67 270 top
R20  10k  [0603-RES]  95,28.96 90 top
R21  330  [0603-RES]  95,32.26 90 top
R22  33k  [0603-RES]  130.58,37.67 270 top
R23  10k  [0603-RES]  130.56,28.96 90 top
R24  330  [0603-RES]  130.56,32.26 90 top
R25  33k  [0603-RES]  23.9,57.23 270 top
R26  10k  [0603-RES]  23.88,48.51 90 top
R27  330  [0603-RES]  23.88,51.82 90 top
R28  33k  [0603-RES]  59.46,57.23 270 top
R29  10k  [0603-RES]  59.44,48.51 90 top
R30  330  [0603-RES]  59.44,51.82 90 top
R31  33k  [0603-RES]  95.02,57.23 270 top
R32  10k  [0603-RES]  95,48.51 90 top
R33  330  [0603-RES]  95,51.82 90 top
R34  33k  [0603-RES]  130.58,57.23 270 top
R35  10k  [0603-RES]  130.56,48.51 90 top
R36  330  [0603-RES]  130.56,51.82 90 top
R37  33k  [0603-RES]  23.9,76.78 270 top
R38  10k  [0603-RES]  23.88,68.07 90 top
R39  330  [0603-RES]  23.88,71.37 90 top
R40  33k  [0603-RES]  59.46,76.78 270 top
R41  10k  [0603-RES]  59.44,68.07 90 top
R42  330  [0603-RES]  59.44,71.37 90 top
R43  33k  [0603-RES]  95.02,76.78 270 top
R44  10k  [0603-RES]  95,68.07 90 top
R45  330  [0603-RES]  95,71.37 90 top
R46  33k  [0603-RES]  130.58,76.78 270 top
R47  10k  [0603-RES]  130.56,68.07 90 top
R48  330  [0603-RES]  130.56,71.37 90 top
R49  33k  [0603-RES]  23.9,96.34 270 top
R50  10k  [0603-RES]  23.88,87.63 90 top
R51  330  [0603-RES]  23.88,90.93 90 top
R52  33k  [0603-RES]  59.46,96.34 270 top
R53  10k  [0603-RES]  59.44,87.63 90 top
R54  330  [0603-RES]  59.44,90.93 90 top
R55  33k  [0603-RES]  95.02,96.34 270 top
R56  10k  [0603-RES]  95,87.63 90 top
R57  330  [0603-RES]  95,90.93 90 top
R58  33k  [0603-RES]  130.58,96.34 270 top
R59  10k  [0603-RES]  130.56,87.63 90 top
R60  330  [0603-RES]  130.56,90.93 90 top
R61  33k  [0603-RES]  23.9,115.9 270 top
R62  10k  [0603-RES]  23.88,107.19 90 top
R63  330  [0603-RES]  23.88,110.49 90 top
R64  33k  [0603-RES]  59.46,115.9 270 top
R65  10k  [0603-RES]  59.44,107.19 90 top
R66  330  [0603-RES]  59.44,110.49 90 top
R67  33k  [0603-RES]  95.02,115.9 270 top
R68  10k  [0603-RES]  95,107.19 90 top
R69  330  [0603-RES]  95,110.49 90 top
R70  33k  [0603-RES]  130.58,115.9 270 top
R71  10k  [0603-RES]  130.56,107.19 90 top
R72  330  [0603-RES]  130.56,110.49 90 top
U1  VENUS634SMD  [LGA44]  30.48,13.21 0 top
U2  33nH  [0603-RES]  36.54,19.34 270 top
U3  V_REG_LDOSMD  [SOT23-5]  17.78,11.94 180 top
U4  SPI_FLASH-X25XXSMD1  [SO08-EIAJ]  27.94,22.61 270 top
U5  VENUS634SMD  [LGA44]  66.04,13.21 0 top
U6  33nH  [0603-RES]  72.1,19.34 270 top
U7  SPI_FLASH-X25XXSMD1  [SO08-EIAJ]  63.5,22.61 270 top
U8  V_REG_LDOSMD  [SOT23-5]  53.34,11.94 180 top
U9  VENUS634SMD  [LGA44]  101.6,13.21 0 top
U10  33nH  [0603-RES]  107.66,19.34 270 top
U11  SPI_FLASH-X25XXSMD1  [SO08-EIAJ]  99.06,22.61 270 top
U12  V_REG_LDOSMD  [SOT23-5]  88.9,11.94 180 top
U13  VENUS634SMD  [LGA44]  137.16,13.21 0 top
U14  33nH  [0603-RES]  143.22,19.34 270 top
U15  SPI_FLASH-X25XXSMD1  [SO08-EIAJ]  134.62,22.61 270 top
U16  V_REG_LDOSMD  [SOT23-5]  124.46,11.94 180 top
U17  VENUS634SMD  [LGA44]  30.48,32.77 0 top
U18  33nH  [0603-RES]  36.54,38.9 270 top
U19  SPI_FLASH-X25XXSMD1  [SO08-EIAJ]  27.94,42.16 270 top
U20  V_REG_LDOSMD  [SOT23-5]  17.78,31.5 180 top
U21  VENUS634SMD  [LGA44]  66.04,32.77 0 top
U22  33nH  [0603-RES]  72.1,38.9 270 top
U23  SPI_FLASH-X25XXSMD1  [SO08-EIAJ]  63.5,42.16 270 top
U24  V_REG_LDOSMD  [SOT23-5]  53.34,31.5 180 top
U25  VENUS634SMD  [LGA44]  101.6,32.77 0 top
U26  33nH  [0603-RES]  107.66,38.9 270 top
U27  SPI_FLASH-X25XXSMD1  [SO08-EIAJ]  99.06,42.16 270 top
U28  V_REG_LDOSMD  [SOT23-5]  88.9,31.5 180 top
U29  VENUS634SMD  [LGA44]  137.16,32.77 0 top
U30  33nH  [0603-RES]  143.22,38.9 270 top
U31  SPI_FLASH-X25XXSMD1  [SO08-EIAJ]  134.62,42.16 270 top
U32  V_REG_LDOSMD  [SOT23-5]  124.46,31.5 180 top
U33  VENUS634SMD  [LGA44]  30.48,52.32 0 top
U34  33nH  [0603-RES]  36.54,58.46 270 top
U35  SPI_FLASH-X25XXSMD1  [SO08-EIAJ]  27.94,61.72 270 top
U36  V_REG_LDOSMD  [SOT23-5]  17.78,51.05 180 top
U37  VENUS634SMD  [LGA44]  66.04,52.32 0 top
U38  33nH  [0603-RES]  72.1,58.46 270 top
U39  SPI_FLASH-X25XXSMD1  [SO08-EIAJ]  63.5,61.72 270 top
U40  V_REG_LDOSMD  [SOT23-5]  53.34,51.05 180 top
U41  VENUS634SMD  [LGA44]  101.6,52.32 0 top
U42  33nH  [0603-RES]  107.66,58.46 270 top
U43  SPI_FLASH-X25XXSMD1  [SO08-EIAJ]  99.06,61.72 270 top
U44  V_REG_LDOSMD  [SOT23-5]  88.9,51.05 180 top
U45  VENUS634SMD  [LGA44]  137.16,52.32 0 top
U46  33nH  [0603-RES]  143.22,58.46 270 top
U47  SPI_FLASH-X25XXSMD1  [SO08-EIAJ]  134.62,61.72 270 top
U48  V_REG_LDOSMD  [SOT23-5]  124.46,51.05 180 top
U49  VENUS634SMD  [LGA44]  30.48,71.88 0 top
U50  33nH  [0603-RES]  36.54,78.02 270 top
U51  SPI_FLASH-X25XXSMD1  [SO08-EIAJ]  27.94,81.28 270 top
U52  V_REG_LDOSMD  [SOT23-5]  17.78,70.61 180 top
U53  VENUS634SMD  [LGA44]  66.04,71.88 0 top
U54  33nH  [0603-RES]  72.1,78.02 270 top
U55  SPI_FLASH-X25XXSMD1  [SO08-EIAJ]  63.5,81.28 270 top
U56  V_REG_LDOSMD  [SOT23-5]  53.34,70.61 180 top
U57  VENUS634SMD  [LGA44]  101.6,71.88 0 top
U58  33nH  [0603-RES]  107.66,78.02 270 top
U59  SPI_FLASH-X25XXSMD1  [SO08-EIAJ]  99.06,81.28 270 top
U60  V_REG_LDOSMD  [SOT23-5]  88.9,70.61 180 top
U61  VENUS634SMD  [LGA44]  137.16,71.88 0 top
U62  33nH  [0603-RES]  143.22,78.02 270 top
U63  SPI_FLASH-X25XXSMD1  [SO08-EIAJ]  134.62,81.28 270 top
U64  V_REG_LDOSMD  [SOT23-5]  124.46,70.61 180 top
U65  VENUS634SMD  [LGA44]  30.48,91.44 0 top
U66  33nH  [0603-RES]  36.54,97.58 270 top
U67  SPI_FLASH-X25XXSMD1  [SO08-EIAJ]  27.94,100.84 270 top
U68  V_REG_LDOSMD  [SOT23-5]  17.78,90.17 180 top
U69  VENUS634SMD  [LGA44]  66.04,91.44 0 top
U70  33nH  [0603-RES]  72.1,97.58 270 top
U71  SPI_FLASH-X25XXSMD1  [SO08-EIAJ]  63.5,100.84 270 top
U72  V_REG_LDOSMD  [SOT23-5]  53.34,90.17 180 top
U73  VENUS634SMD  [LGA44]  101.6,91.44 0 top
U74  33nH  [0603-RES]  107.66,97.58 270 top
U75  SPI_FLASH-X25XXSMD1  [SO08-EIAJ]  99.06,100.84 270 top
U76  V_REG_LDOSMD  [SOT23-5]  88.9,90.17 180 top
U77  VENUS634SMD  [LGA44]  137.16,91.44 0 top
U78  33nH  [0603-RES]  143.22,97.58 270 top
U79  SPI_FLASH-X25XXSMD1  [SO08-EIAJ]  134.62,100.84 270 top
U80  V_REG_LDOSMD  [SOT23-5]  124.46,90.17 180 top
U81  VENUS634SMD  [LGA44]  30.48,111 0 top
U82  33nH  [0603-RES]  36.54,117.13 270 top
U83  SPI_FLASH-X25XXSMD1  [SO08-EIAJ]  27.94,120.4 270 top
U84  V_REG_LDOSMD  [SOT23-5]  17.78,109.73 180 top
U85  VENUS634SMD  [LGA44]  66.04,111 0 top
U86  33nH  [0603-RES]  72.1,117.13 270 top
U87  SPI_FLASH-X25XXSMD1  [SO08-EIAJ]  63.5,120.4 270 top
U88  V_REG_LDOSMD  [SOT23-5]  53.34,109.73 180 top
U89  VENUS634SMD  [LGA44]  101.6,111 0 top
U90  33nH  [0603-RES]  107.66,117.13 270 top
U91  SPI_FLASH-X25XXSMD1  [SO08-EIAJ]  99.06,120.4 270 top
U92  V_REG_LDOSMD  [SOT23-5]  88.9,109.73 180 top
U93  VENUS634SMD  [LGA44]  137.16,111 0 top
U94  33nH  [0603-RES]  143.22,117.13 270 top
U95  SPI_FLASH-X25XXSMD1  [SO08-EIAJ]  134.62,120.4 270 top
U96  V_REG_LDOSMD  [SOT23-5]  124.46,109.73 180 top
U$1  LOGO-SFESK  [SFE-LOGO-FLAME]  38.1,22.1 0 top
U$2  [OSHW-LOGO-S]  39.12,10.29 0 top
U$3  [SFE-NEW-WEBLOGO]  35.56,15.75 0 bottom
U$4  LOGO-SFESK  [SFE-LOGO-FLAME]  73.66,22.1 0 top
U$5  [OSHW-LOGO-S]  74.68,10.29 0 top
U$6  [SFE-NEW-WEBLOGO]  71.12,15.75 0 bottom
U$7  LOGO-SFESK  [SFE-LOGO-FLAME]  109.22,22.1 0 top
U$8  [OSHW-LOGO-S]  110.24,10.29 0 top
U$9  [SFE-NEW-WEBLOGO]  106.68,15.75 0 bottom
U$10  LOGO-SFESK  [SFE-LOGO-FLAME]  144.78,22.1 0 top
U$11  [OSHW-LOGO-S]  145.8,10.29 0 top
U$12  [SFE-NEW-WEBLOGO]  142.24,15.75 0 bottom
U$13  LOGO-SFESK  [SFE-LOGO-FLAME]  38.1,41.66 0 top
U$14  [OSHW-LOGO-S]  39.12,29.84 0 top
U$15  [SFE-NEW-WEBLOGO]  35.56,35.31 0 bottom
U$16  LOGO-SFESK  [SFE-LOGO-FLAME]  73.66,41.66 0 top
U$17  [OSHW-LOGO-S]  74.68,29.84 0 top
U$18  [SFE-NEW-WEBLOGO]  71.12,35.31 0 bottom
U$19  LOGO-SFESK  [SFE-LOGO-FLAME]  109.22,41.66 0 top
U$20  [OSHW-LOGO-S]  110.24,29.84 0 top
U$21  [SFE-NEW-WEBLOGO]  106.68,35.31 0 bottom
U$22  LOGO-SFESK  [SFE-LOGO-FLAME]  144.78,41.66 0 top
U$23  [OSHW-LOGO-S]  145.8,29.84 0 top
U$24  [SFE-NEW-WEBLOGO]  142.24,35.31 0 bottom
U$25  LOGO-SFESK  [SFE-LOGO-FLAME]  38.1,61.21 0 top
U$26  [OSHW-LOGO-S]  39.12,49.4 0 top
U$27  [SFE-NEW-WEBLOGO]  35.56,54.86 0 bottom
U$28  LOGO-SFESK  [SFE-LOGO-FLAME]  73.66,61.21 0 top
U$29  [OSHW-LOGO-S]  74.68,49.4 0 top
U$30  [SFE-NEW-WEBLOGO]  71.12,54.86 0 bottom
U$31  LOGO-SFESK  [SFE-LOGO-FLAME]  109.22,61.21 0 top
U$32  [OSHW-LOGO-S]  110.24,49.4 0 top
U$33  [SFE-NEW-WEBLOGO]  106.68,54.86 0 bottom
U$34  LOGO-SFESK  [SFE-LOGO-FLAME]  144.78,61.21 0 top
U$35  [OSHW-LOGO-S]  145.8,49.4 0 top
U$36  [SFE-NEW-WEBLOGO]  142.24,54.86 0 bottom
U$37  LOGO-SFESK  [SFE-LOGO-FLAME]  38.1,80.77 0 top
U$38  [OSHW-LOGO-S]  39.12,68.96 0 top
U$39  [SFE-NEW-WEBLOGO]  35.56,74.42 0 bottom
U$40  LOGO-SFESK  [SFE-LOGO-FLAME]  73.66,80.77 0 top
U$41  [OSHW-LOGO-S]  74.68,68.96 0 top
U$42  [SFE-NEW-WEBLOGO]  71.12,74.42 0 bottom
U$43  LOGO-SFESK  [SFE-LOGO-FLAME]  109.22,80.77 0 top
U$44  [OSHW-LOGO-S]  110.24,68.96 0 top
U$45  [SFE-NEW-WEBLOGO]  106.68,74.42 0 bottom
U$46  LOGO-SFESK  [SFE-LOGO-FLAME]  144.78,80.77 0 top
U$47  [OSHW-LOGO-S]  145.8,68.96 0 top
U$48  [SFE-NEW-WEBLOGO]  142.24,74.42 0 bottom
U$49  LOGO-SFESK  [SFE-LOGO-FLAME]  38.1,100.33 0 top
U$50  [OSHW-LOGO-S]  39.12,88.52 0 top
U$51  [SFE-NEW-WEBLOGO]  35.56,93.98 0 bottom
U$52  LOGO-SFESK  [SFE-LOGO-FLAME]  73.66,100.33 0 top
U$53  [OSHW-LOGO-S]  74.68,88.52 0 top
U$54  [SFE-NEW-WEBLOGO]  71.12,93.98 0 bottom
U$55  LOGO-SFESK  [SFE-LOGO-FLAME]  109.22,100.33 0 top
U$56  [OSHW-LOGO-S]  110.24,88.52 0 top
U$57  [SFE-NEW-WEBLOGO]  106.68,93.98 0 bottom
U$58  LOGO-SFESK  [SFE-LOGO-FLAME]  144.78,100.33 0 top
U$59  [OSHW-LOGO-S]  145.8,88.52 0 top
U$60  [SFE-NEW-WEBLOGO]  142.24,93.98 0 bottom
U$61  LOGO-SFESK  [SFE-LOGO-FLAME]  38.1,119.89 0 top
U$62  [OSHW-LOGO-S]  39.12,108.08 0 top
U$63  [SFE-NEW-WEBLOGO]  35.56,113.54 0 bottom
U$64  LOGO-SFESK  [SFE-LOGO-FLAME]  73.66,119.89 0 top
U$65  [OSHW-LOGO-S]  74.68,108.08 0 top
U$66  [SFE-NEW-WEBLOGO]  71.12,113.54 0 bottom
U$67  LOGO-SFESK  [SFE-LOGO-FLAME]  109.22,119.89 0 top
U$68  [OSHW-LOGO-S]  110.24,108.08 0 top
U$69  [SFE-NEW-WEBLOGO]  106.68,113.54 0 bottom
U$70  LOGO-SFESK  [SFE-LOGO-FLAME]  144.78,119.89 0 top
U$71  [OSHW-LOGO-S]  145.8,108.08 0 top
U$72  [SFE-NEW-WEBLOGO]  142.24,113.54 0 bottom

## Library data of the parts
C1 C5 C9 C13 C17 C21 C25 C29 C33 C37 C41 C45 C49 C53 C57 C61 C65 C69 C73 C77 C81 C85 C89 C93 = SparkFun-Capacitors; PROD_ID: CAP-00810
C2 C6 C10 C14 C18 C22 C26 C30 C34 C38 C42 C46 C50 C54 C58 C62 C66 C70 C74 C78 C82 C86 C90 C94 J$1-J$24 JP2 JP8 JP13 JP18 JP23 JP28 JP33 JP38 JP43 JP48 JP53 JP58 JP63 JP68 JP73 JP78 JP83 JP88 JP93 JP98 JP103 JP108 JP113 JP118 U1 U3-U5 U7-U9 U11-U13 U15-U17 U19-U21 U23-U25 U27-U29 U31-U33 U35-U37 U39-U41 U43-U45 U47-U49 U51-U53 U55-U57 U59-U61 U63-U65 U67-U69 U71-U73 U75-U77 U79-U81 U83-U85 U87-U89 U91-U93 U95 U96 U$1 U$4 U$7 U$10 U$13 U$16 U$19 U$22 U$25 U$28 U$31 U$34 U$37 U$40 U$43 U$46 U$49 U$52 U$55 U$58 U$61 U$64 U$67 U$70 = SparkFun
C3 C7 C11 C15 C19 C23 C27 C31 C35 C39 C43 C47 C51 C55 C59 C63 C67 C71 C75 C79 C83 C87 C91 C95 = SparkFun-Capacitors; PROD_ID: CAP-00868
C4 C8 C12 C16 C20 C24 C28 C32 C36 C40 C44 C48 C52 C56 C60 C64 C68 C72 C76 C80 C84 C88 C92 C96 = SparkFun-Capacitors; PROD_ID: CAP-07876
E$1 = SparkFun-Retired
E$3 E$4 FID1-FID48 U$2 U$3 U$5 U$6 U$8 U$9 U$11 U$12 U$14 U$15 U$17 U$18 U$20 U$21 U$23 U$24 U$26 U$27 U$29 U$30 U$32 U$33 U$35 U$36 U$38 U$39 U$41 U$42 U$44 U$45 U$47 U$48 U$50 U$51 U$53 U$54 U$56 U$57 U$59 U$60 U$62 U$63 U$65 U$66 U$68 U$69 U$71 U$72 = SparkFun-Aesthetics
JP1 JP3 JP6 JP7 JP11 JP12 JP16 JP17 JP21 JP22 JP26 JP27 JP31 JP32 JP36 JP37 JP41 JP42 JP46 JP47 JP51 JP52 JP56 JP57 JP61 JP62 JP66 JP67 JP71 JP72 JP76 JP77 JP81 JP82 JP86 JP87 JP91 JP92 JP96 JP97 JP101 JP102 JP106 JP107 JP111 JP112 JP116 JP117 = SparkFun-Connectors
JP4 JP5 JP9 JP10 JP14 JP15 JP19 JP20 JP24 JP25 JP29 JP30 JP34 JP35 JP39 JP40 JP44 JP45 JP49 JP50 JP54 JP55 JP59 JP60 JP64 JP65 JP69 JP70 JP74 JP75 JP79 JP80 JP84 JP85 JP89 JP90 JP94 JP95 JP99 JP100 JP104 JP105 JP109 JP110 JP114 JP115 JP119 JP120 = SparkFun-Passives
LED1-LED24 = SparkFun-LED; PROD_ID: DIO-00821
R1 R3 R7 R10 R13 R16 R19 R22 R25 R28 R31 R34 R37 R40 R43 R46 R49 R52 R55 R58 R61 R64 R67 R70 = SparkFun-Resistors
R2 R4 R8 R11 R14 R17 R20 R23 R26 R29 R32 R35 R38 R41 R44 R47 R50 R53 R56 R59 R62 R65 R68 R71 = SparkFun-Resistors; PROD_ID: RES-00824
R5 R6 R9 R12 R15 R18 R21 R24 R27 R30 R33 R36 R39 R42 R45 R48 R51 R54 R57 R60 R63 R66 R69 R72 = SparkFun-Resistors; PROD_ID: RES-00818
U2 U6 U10 U14 U18 U22 U26 U30 U34 U38 U42 U46 U50 U54 U58 U62 U66 U70 U74 U78 U82 U86 U90 U94 = SparkFun-Resistors; PROD_ID: NDUC-07874

## Nets
3.3V: C1.1 C2.A C4.1 JP1.4 JP5.2 LED3.A R1.2 U1.2 U1.36 U2.1 U3.5 U4.3 U4.7 U4.8
3.3V1: C5.1 C6.A C8.1 JP6.4 JP10.2 LED1.A R3.2 U5.2 U5.36 U6.1 U7.3 U7.7 U7.8 U8.5
3.3V2: C9.1 C10.A C12.1 JP11.4 JP15.2 LED2.A R7.2 U9.2 U9.36 U10.1 U11.3 U11.7 U11.8 U12.5
3.3V3: C13.1 C14.A C16.1 JP16.4 JP20.2 LED4.A R10.2 U13.2 U13.36 U14.1 U15.3 U15.7 U15.8 U16.5
3.3V4: C17.1 C18.A C20.1 JP21.4 JP25.2 LED5.A R13.2 U17.2 U17.36 U18.1 U19.3 U19.7 U19.8 U20.5
3.3V5: C21.1 C22.A C24.1 JP26.4 JP30.2 LED6.A R16.2 U21.2 U21.36 U22.1 U23.3 U23.7 U23.8 U24.5
3.3V6: C25.1 C26.A C28.1 JP31.4 JP35.2 LED7.A R19.2 U25.2 U25.36 U26.1 U27.3 U27.7 U27.8 U28.5
3.3V7: C29.1 C30.A C32.1 JP36.4 JP40.2 LED8.A R22.2 U29.2 U29.36 U30.1 U31.3 U31.7 U31.8 U32.5
3.3V8: C33.1 C34.A C36.1 JP41.4 JP45.2 LED9.A R25.2 U33.2 U33.36 U34.1 U35.3 U35.7 U35.8 U36.5
3.3V9: C37.1 C38.A C40.1 JP46.4 JP50.2 LED10.A R28.2 U37.2 U37.36 U38.1 U39.3 U39.7 U39.8 U40.5
3.3V10: C41.1 C42.A C44.1 JP51.4 JP55.2 LED11.A R31.2 U41.2 U41.36 U42.1 U43.3 U43.7 U43.8 U44.5
3.3V11: C45.1 C46.A C48.1 JP56.4 JP60.2 LED12.A R34.2 U45.2 U45.36 U46.1 U47.3 U47.7 U47.8 U48.5
3.3V12: C49.1 C50.A C52.1 JP61.4 JP65.2 LED13.A R37.2 U49.2 U49.36 U50.1 U51.3 U51.7 U51.8 U52.5
3.3V13: C53.1 C54.A C56.1 JP66.4 JP70.2 LED14.A R40.2 U53.2 U53.36 U54.1 U55.3 U55.7 U55.8 U56.5
3.3V14: C57.1 C58.A C60.1 JP71.4 JP75.2 LED15.A R43.2 U57.2 U57.36 U58.1 U59.3 U59.7 U59.8 U60.5
3.3V15: C61.1 C62.A C64.1 JP76.4 JP80.2 LED16.A R46.2 U61.2 U61.36 U62.1 U63.3 U63.7 U63.8 U64.5
3.3V16: C65.1 C66.A C68.1 JP81.4 JP85.2 LED17.A R49.2 U65.2 U65.36 U66.1 U67.3 U67.7 U67.8 U68.5
3.3V17: C69.1 C70.A C72.1 JP86.4 JP90.2 LED18.A R52.2 U69.2 U69.36 U70.1 U71.3 U71.7 U71.8 U72.5
3.3V18: C73.1 C74.A C76.1 JP91.4 JP95.2 LED19.A R55.2 U73.2 U73.36 U74.1 U75.3 U75.7 U75.8 U76.5
3.3V19: C77.1 C78.A C80.1 JP96.4 JP100.2 LED20.A R58.2 U77.2 U77.36 U78.1 U79.3 U79.7 U79.8 U80.5
3.3V20: C81.1 C82.A C84.1 JP101.4 JP105.2 LED21.A R61.2 U81.2 U81.36 U82.1 U83.3 U83.7 U83.8 U84.5
3.3V21: C85.1 C86.A C88.1 JP106.4 JP110.2 LED22.A R64.2 U85.2 U85.36 U86.1 U87.3 U87.7 U87.8 U88.5
3.3V22: C89.1 C90.A C92.1 JP111.4 JP115.2 LED23.A R67.2 U89.2 U89.36 U90.1 U91.3 U91.7 U91.8 U92.5
3.3V23: C93.1 C94.A C96.1 JP116.4 JP120.2 LED24.A R70.2 U93.2 U93.36 U94.1 U95.3 U95.7 U95.8 U96.5
BTSEL: R2.2 U1.9
BTSEL1: R4.2 U5.9
BTSEL2: R8.2 U9.9
BTSEL3: R11.2 U13.9
BTSEL4: R14.2 U17.9
BTSEL5: R17.2 U21.9
BTSEL6: R20.2 U25.9
BTSEL7: R23.2 U29.9
BTSEL8: R26.2 U33.9
BTSEL9: R29.2 U37.9
BTSEL10: R32.2 U41.9
BTSEL11: R35.2 U45.9
BTSEL12: R38.2 U49.9
BTSEL13: R41.2 U53.9
BTSEL14: R44.2 U57.9
BTSEL15: R47.2 U61.9
BTSEL16: R50.2 U65.9
BTSEL17: R53.2 U69.9
BTSEL18: R56.2 U73.9
BTSEL19: R59.2 U77.9
BTSEL20: R62.2 U81.9
BTSEL21: R65.2 U85.9
BTSEL22: R68.2 U89.9
BTSEL23: R71.2 U93.9
CLK: U1.41 U4.6
CLK1: U5.41 U7.6
CLK2: U9.41 U11.6
CLK3: U13.41 U15.6
CLK4: U17.41 U19.6
CLK5: U21.41 U23.6
CLK6: U25.41 U27.6
CLK7: U29.41 U31.6
CLK8: U33.41 U35.6
CLK9: U37.41 U39.6
CLK10: U41.41 U43.6
CLK11: U45.41 U47.6
CLK12: U49.41 U51.6
CLK13: U53.41 U55.6
CLK14: U57.41 U59.6
CLK15: U61.41 U63.6
CLK16: U65.41 U67.6
CLK17: U69.41 U71.6
CLK18: U73.41 U75.6
CLK19: U77.41 U79.6
CLK20: U81.41 U83.6
CLK21: U85.41 U87.6
CLK22: U89.41 U91.6
CLK23: U93.41 U95.6
CS: U1.43 U4.1
CS1: U5.43 U7.1
CS2: U9.43 U11.1
CS3: U13.43 U15.1
CS4: U17.43 U19.1
CS5: U21.43 U23.1
CS6: U25.43 U27.1
CS7: U29.43 U31.1
CS8: U33.43 U35.1
CS9: U37.43 U39.1
CS10: U41.43 U43.1
CS11: U45.43 U47.1
CS12: U49.43 U51.1
CS13: U53.43 U55.1
CS14: U57.43 U59.1
CS15: U61.43 U63.1
CS16: U65.43 U67.1
CS17: U69.43 U71.1
CS18: U73.43 U75.1
CS19: U77.43 U79.1
CS20: U81.43 U83.1
CS21: U85.43 U87.1
CS22: U89.43 U91.1
CS23: U93.43 U95.1
GND: C1.2 C2.C C3.2 JP1.1 JP2.1 JP4.1 R2.1 U1.10 U1.11 U1.14 U1.15 U1.19 U1.37 U3.2 U4.4
GND1: C5.2 C6.C C7.2 JP6.1 JP8.1 JP9.1 R4.1 U5.10 U5.11 U5.14 U5.15 U5.19 U5.37 U7.4 U8.2
GND2: C9.2 C10.C C11.2 JP11.1 JP13.1 JP14.1 R8.1 U9.10 U9.11 U9.14 U9.15 U9.19 U9.37 U11.4 U12.2
GND3: C13.2 C14.C C15.2 JP16.1 JP18.1 JP19.1 R11.1 U13.10 U13.11 U13.14 U13.15 U13.19 U13.37 U15.4 U16.2
GND4: C17.2 C18.C C19.2 JP21.1 JP23.1 JP24.1 R14.1 U17.10 U17.11 U17.14 U17.15 U17.19 U17.37 U19.4 U20.2
GND5: C21.2 C22.C C23.2 JP26.1 JP28.1 JP29.1 R17.1 U21.10 U21.11 U21.14 U21.15 U21.19 U21.37 U23.4 U24.2
GND6: C25.2 C26.C C27.2 JP31.1 JP33.1 JP34.1 R20.1 U25.10 U25.11 U25.14 U25.15 U25.19 U25.37 U27.4 U28.2
GND7: C29.2 C30.C C31.2 JP36.1 JP38.1 JP39.1 R23.1 U29.10 U29.11 U29.14 U29.15 U29.19 U29.37 U31.4 U32.2
GND8: C33.2 C34.C C35.2 JP41.1 JP43.1 JP44.1 R26.1 U33.10 U33.11 U33.14 U33.15 U33.19 U33.37 U35.4 U36.2
GND9: C37.2 C38.C C39.2 JP46.1 JP48.1 JP49.1 R29.1 U37.10 U37.11 U37.14 U37.15 U37.19 U37.37 U39.4 U40.2
GND10: C41.2 C42.C C43.2 JP51.1 JP53.1 JP54.1 R32.1 U41.10 U41.11 U41.14 U41.15 U41.19 U41.37 U43.4 U44.2
GND11: C45.2 C46.C C47.2 JP56.1 JP58.1 JP59.1 R35.1 U45.10 U45.11 U45.14 U45.15 U45.19 U45.37 U47.4 U48.2
GND12: C49.2 C50.C C51.2 JP61.1 JP63.1 JP64.1 R38.1 U49.10 U49.11 U49.14 U49.15 U49.19 U49.37 U51.4 U52.2
GND13: C53.2 C54.C C55.2 JP66.1 JP68.1 JP69.1 R41.1 U53.10 U53.11 U53.14 U53.15 U53.19 U53.37 U55.4 U56.2
GND14: C57.2 C58.C C59.2 JP71.1 JP73.1 JP74.1 R44.1 U57.10 U57.11 U57.14 U57.15 U57.19 U57.37 U59.4 U60.2
GND15: C61.2 C62.C C63.2 JP76.1 JP78.1 JP79.1 R47.1 U61.10 U61.11 U61.14 U61.15 U61.19 U61.37 U63.4 U64.2
GND16: C65.2 C66.C C67.2 JP81.1 JP83.1 JP84.1 R50.1 U65.10 U65.11 U65.14 U65.15 U65.19 U65.37 U67.4 U68.2
GND17: C69.2 C70.C C71.2 JP86.1 JP88.1 JP89.1 R53.1 U69.10 U69.11 U69.14 U69.15 U69.19 U69.37 U71.4 U72.2
GND18: C73.2 C74.C C75.2 JP91.1 JP93.1 JP94.1 R56.1 U73.10 U73.11 U73.14 U73.15 U73.19 U73.37 U75.4 U76.2
GND19: C77.2 C78.C C79.2 JP96.1 JP98.1 JP99.1 R59.1 U77.10 U77.11 U77.14 U77.15 U77.19 U77.37 U79.4 U80.2
GND20: C81.2 C82.C C83.2 JP101.1 JP103.1 JP104.1 R62.1 U81.10 U81.11 U81.14 U81.15 U81.19 U81.37 U83.4 U84.2
GND21: C85.2 C86.C C87.2 JP106.1 JP108.1 JP109.1 R65.1 U85.10 U85.11 U85.14 U85.15 U85.19 U85.37 U87.4 U88.2
GND22: C89.2 C90.C C91.2 JP111.1 JP113.1 JP114.1 R68.1 U89.10 U89.11 U89.14 U89.15 U89.19 U89.37 U91.4 U92.2
GND23: C93.2 C94.C C95.2 JP116.1 JP118.1 JP119.1 R71.1 U93.10 U93.11 U93.14 U93.15 U93.19 U93.37 U95.4 U96.2
GPIO1: JP3.3 U1.6
GPIO2: JP3.4 U1.5
GPIO3: JP7.3 U5.6
GPIO4: JP7.4 U5.5
GPIO5: JP7.5 JP9.2 U5.8
GPIO6: JP12.3 U9.6
GPIO7: JP12.4 U9.5
GPIO8: JP12.5 JP14.2 U9.8
GPIO9: JP17.3 U13.6
GPIO10: JP17.4 U13.5
GPIO11: JP17.5 JP19.2 U13.8
GPIO12: JP22.3 U17.6
GPIO13: JP22.4 U17.5
GPIO14: JP22.5 JP24.2 U17.8
GPIO15: JP27.3 U21.6
GPIO16: JP27.4 U21.5
GPIO17: JP27.5 JP29.2 U21.8
GPIO18: JP32.3 U25.6
GPIO19: JP32.4 U25.5
GPIO20: JP32.5 JP34.2 U25.8
GPIO21: JP37.3 U29.6
GPIO22: JP37.4 U29.5
GPIO23: JP37.5 JP39.2 U29.8
GPIO24: JP3.5 JP4.2 U1.8
GPIO25: JP42.3 U33.6
GPIO26: JP42.4 U33.5
GPIO27: JP42.5 JP44.2 U33.8
GPIO28: JP47.3 U37.6
GPIO29: JP47.4 U37.5
GPIO30: JP47.5 JP49.2 U37.8
GPIO31: JP52.3 U41.6
GPIO32: JP52.4 U41.5
GPIO33: JP52.5 JP54.2 U41.8
GPIO34: JP57.3 U45.6
GPIO35: JP57.4 U45.5
GPIO36: JP57.5 JP59.2 U45.8
GPIO37: JP62.3 U49.6
GPIO38: JP62.4 U49.5
GPIO39: JP62.5 JP64.2 U49.8
GPIO40: JP67.3 U53.6
GPIO41: JP67.4 U53.5
GPIO42: JP67.5 JP69.2 U53.8
GPIO43: JP72.3 U57.6
GPIO44: JP72.4 U57.5
GPIO45: JP72.5 JP74.2 U57.8
GPIO46: JP77.3 U61.6
GPIO47: JP77.4 U61.5
GPIO48: JP77.5 JP79.2 U61.8
GPIO49: JP82.3 U65.6
GPIO50: JP82.4 U65.5
GPIO51: JP82.5 JP84.2 U65.8
GPIO52: JP87.3 U69.6
GPIO53: JP87.4 U69.5
GPIO54: JP87.5 JP89.2 U69.8
GPIO55: JP92.3 U73.6
GPIO56: JP92.4 U73.5
GPIO57: JP92.5 JP94.2 U73.8
GPIO58: JP97.3 U77.6
GPIO59: JP97.4 U77.5
GPIO60: JP97.5 JP99.2 U77.8
GPIO61: JP102.3 U81.6
GPIO62: JP102.4 U81.5
GPIO63: JP102.5 JP104.2 U81.8
GPIO64: JP107.3 U85.6
GPIO65: JP107.4 U85.5
GPIO66: JP107.5 JP109.2 U85.8
GPIO67: JP112.3 U89.6
GPIO68: JP112.4 U89.5
GPIO69: JP112.5 JP114.2 U89.8
GPIO70: JP117.3 U93.6
GPIO71: JP117.4 U93.5
GPIO72: JP117.5 JP119.2 U93.8
MISO: U1.39 U4.2
MISO1: U5.39 U7.2
MISO2: U9.39 U11.2
MISO3: U13.39 U15.2
MISO4: U17.39 U19.2
MISO5: U21.39 U23.2
MISO6: U25.39 U27.2
MISO7: U29.39 U31.2
MISO8: U33.39 U35.2
MISO9: U37.39 U39.2
MISO10: U41.39 U43.2
MISO11: U45.39 U47.2
MISO12: U49.39 U51.2
MISO13: U53.39 U55.2
MISO14: U57.39 U59.2
MISO15: U61.39 U63.2
MISO16: U65.39 U67.2
MISO17: U69.39 U71.2
MISO18: U73.39 U75.2
MISO19: U77.39 U79.2
MISO20: U81.39 U83.2
MISO21: U85.39 U87.2
MISO22: U89.39 U91.2
MISO23: U93.39 U95.2
MOSI: U1.38 U4.5
MOSI1: U5.38 U7.5
MOSI2: U9.38 U11.5
MOSI3: U13.38 U15.5
MOSI4: U17.38 U19.5
MOSI5: U21.38 U23.5
MOSI6: U25.38 U27.5
MOSI7: U29.38 U31.5
MOSI8: U33.38 U35.5
MOSI9: U37.38 U39.5
MOSI10: U41.38 U43.5
MOSI11: U45.38 U47.5
MOSI12: U49.38 U51.5
MOSI13: U53.38 U55.5
MOSI14: U57.38 U59.5
MOSI15: U61.38 U63.5
MOSI16: U65.38 U67.5
MOSI17: U69.38 U71.5
MOSI18: U73.38 U75.5
MOSI19: U77.38 U79.5
MOSI20: U81.38 U83.5
MOSI21: U85.38 U87.5
MOSI22: U89.38 U91.5
MOSI23: U93.38 U95.5
N$1: LED3.C R6.1
N$2: J$2.SIG U5.32 U6.2
N$3: C3.1 R1.1 U1.1
N$5: LED1.C R5.1
N$6: C7.1 R3.1 U5.1
N$8: J$3.SIG U9.32 U10.2
N$9: LED2.C R9.1
N$10: C11.1 R7.1 U9.1
N$12: J$4.SIG U13.32 U14.2
N$13: LED4.C R12.1
N$14: J$1.SIG U1.32 U2.2
N$15: C15.1 R10.1 U13.1
N$17: J$5.SIG U17.32 U18.2
N$18: LED5.C R15.1
N$19: C19.1 R13.1 U17.1
N$21: J$6.SIG U21.32 U22.2
N$22: LED6.C R18.1
N$23: C23.1 R16.1 U21.1
N$25: J$7.SIG U25.32 U26.2
N$26: LED7.C R21.1
N$27: C27.1 R19.1 U25.1
N$29: J$8.SIG U29.32 U30.2
N$30: LED8.C R24.1
N$31: C31.1 R22.1 U29.1
N$33: J$9.SIG U33.32 U34.2
N$34: LED9.C R27.1
N$35: C35.1 R25.1 U33.1
N$37: J$10.SIG U37.32 U38.2
N$38: LED10.C R30.1
N$39: C39.1 R28.1 U37.1
N$41: J$11.SIG U41.32 U42.2
N$42: LED11.C R33.1
N$43: C43.1 R31.1 U41.1
N$45: J$12.SIG U45.32 U46.2
N$46: LED12.C R36.1
N$47: C47.1 R34.1 U45.1
N$49: J$13.SIG U49.32 U50.2
N$50: LED13.C R39.1
N$51: C51.1 R37.1 U49.1
N$53: J$14.SIG U53.32 U54.2
N$54: LED14.C R42.1
N$55: C55.1 R40.1 U53.1
N$57: J$15.SIG U57.32 U58.2
N$58: LED15.C R45.1
N$59: C59.1 R43.1 U57.1
N$61: J$16.SIG U61.32 U62.2
N$62: LED16.C R48.1
N$63: C63.1 R46.1 U61.1
N$65: J$17.SIG U65.32 U66.2
N$66: LED17.C R51.1
N$67: C67.1 R49.1 U65.1
N$69: J$18.SIG U69.32 U70.2
N$70: LED18.C R54.1
N$71: C71.1 R52.1 U69.1
N$73: J$19.SIG U73.32 U74.2
N$74: LED19.C R57.1
N$75: C75.1 R55.1 U73.1
N$77: J$20.SIG U77.32 U78.2
N$78: LED20.C R60.1
N$79: C79.1 R58.1 U77.1
N$81: J$21.SIG U81.32 U82.2
N$82: LED21.C R63.1
N$83: C83.1 R61.1 U81.1
N$85: J$22.SIG U85.32 U86.2
N$86: LED22.C R66.1
N$87: C87.1 R64.1 U85.1
N$89: J$23.SIG U89.32 U90.2
N$90: LED23.C R69.1
N$91: C91.1 R67.1 U89.1
N$93: J$24.SIG U93.32 U94.2
N$94: LED24.C R72.1
N$95: C95.1 R70.1 U93.1
NAV: R6.2 U1.7
NAV1: R5.2 U5.7
NAV2: R9.2 U9.7
NAV3: R12.2 U13.7
NAV4: R15.2 U17.7
NAV5: R18.2 U21.7
NAV6: R21.2 U25.7
NAV7: R24.2 U29.7
NAV8: R27.2 U33.7
NAV9: R30.2 U37.7
NAV10: R33.2 U41.7
NAV11: R36.2 U45.7
NAV12: R39.2 U49.7
NAV13: R42.2 U53.7
NAV14: R45.2 U57.7
NAV15: R48.2 U61.7
NAV16: R51.2 U65.7
NAV17: R54.2 U69.7
NAV18: R57.2 U73.7
NAV19: R60.2 U77.7
NAV20: R63.2 U81.7
NAV21: R66.2 U85.7
NAV22: R69.2 U89.7
NAV23: R72.2 U93.7
PPS: JP3.2 U1.40
PPS1: JP7.2 U5.40
PPS2: JP12.2 U9.40
PPS3: JP17.2 U13.40
PPS4: JP22.2 U17.40
PPS5: JP27.2 U21.40
PPS6: JP32.2 U25.40
PPS7: JP37.2 U29.40
PPS8: JP42.2 U33.40
PPS9: JP47.2 U37.40
PPS10: JP52.2 U41.40
PPS11: JP57.2 U45.40
PPS12: JP62.2 U49.40
PPS13: JP67.2 U53.40
PPS14: JP72.2 U57.40
PPS15: JP77.2 U61.40
PPS16: JP82.2 U65.40
PPS17: JP87.2 U69.40
PPS18: JP92.2 U73.40
PPS19: JP97.2 U77.40
PPS20: JP102.2 U81.40
PPS21: JP107.2 U85.40
PPS22: JP112.2 U89.40
PPS23: JP117.2 U93.40
RFGND: C4.2 J$1.GND@0 J$1.GND@1 J$1.GND@2 J$1.GND@3 U1.21 U1.22 U1.24 U1.25 U1.27 U1.28 U1.29 U1.31 U1.33
RFGND1: C8.2 J$2.GND@0 J$2.GND@1 J$2.GND@2 J$2.GND@3 U5.21 U5.22 U5.24 U5.25 U5.27 U5.28 U5.29 U5.31 U5.33
RFGND2: C12.2 J$3.GND@0 J$3.GND@1 J$3.GND@2 J$3.GND@3 U9.21 U9.22 U9.24 U9.25 U9.27 U9.28 U9.29 U9.31 U9.33
RFGND3: C16.2 J$4.GND@0 J$4.GND@1 J$4.GND@2 J$4.GND@3 U13.21 U13.22 U13.24 U13.25 U13.27 U13.28 U13.29 U13.31 U13.33
RFGND4: C20.2 J$5.GND@0 J$5.GND@1 J$5.GND@2 J$5.GND@3 U17.21 U17.22 U17.24 U17.25 U17.27 U17.28 U17.29 U17.31 U17.33
RFGND5: C24.2 J$6.GND@0 J$6.GND@1 J$6.GND@2 J$6.GND@3 U21.21 U21.22 U21.24 U21.25 U21.27 U21.28 U21.29 U21.31 U21.33
RFGND6: C28.2 J$7.GND@0 J$7.GND@1 J$7.GND@2 J$7.GND@3 U25.21 U25.22 U25.24 U25.25 U25.27 U25.28 U25.29 U25.31 U25.33
RFGND7: C32.2 J$8.GND@0 J$8.GND@1 J$8.GND@2 J$8.GND@3 U29.21 U29.22 U29.24 U29.25 U29.27 U29.28 U29.29 U29.31 U29.33
RFGND8: C36.2 J$9.GND@0 J$9.GND@1 J$9.GND@2 J$9.GND@3 U33.21 U33.22 U33.24 U33.25 U33.27 U33.28 U33.29 U33.31 U33.33
RFGND9: C40.2 J$10.GND@0 J$10.GND@1 J$10.GND@2 J$10.GND@3 U37.21 U37.22 U37.24 U37.25 U37.27 U37.28 U37.29 U37.31 U37.33
RFGND10: C44.2 J$11.GND@0 J$11.GND@1 J$11.GND@2 J$11.GND@3 U41.21 U41.22 U41.24 U41.25 U41.27 U41.28 U41.29 U41.31 U41.33
RFGND11: C48.2 J$12.GND@0 J$12.GND@1 J$12.GND@2 J$12.GND@3 U45.21 U45.22 U45.24 U45.25 U45.27 U45.28 U45.29 U45.31 U45.33
RFGND12: C52.2 J$13.GND@0 J$13.GND@1 J$13.GND@2 J$13.GND@3 U49.21 U49.22 U49.24 U49.25 U49.27 U49.28 U49.29 U49.31 U49.33
RFGND13: C56.2 J$14.GND@0 J$14.GND@1 J$14.GND@2 J$14.GND@3 U53.21 U53.22 U53.24 U53.25 U53.27 U53.28 U53.29 U53.31 U53.33
RFGND14: C60.2 J$15.GND@0 J$15.GND@1 J$15.GND@2 J$15.GND@3 U57.21 U57.22 U57.24 U57.25 U57.27 U57.28 U57.29 U57.31 U57.33
RFGND15: C64.2 J$16.GND@0 J$16.GND@1 J$16.GND@2 J$16.GND@3 U61.21 U61.22 U61.24 U61.25 U61.27 U61.28 U61.29 U61.31 U61.33
RFGND16: C68.2 J$17.GND@0 J$17.GND@1 J$17.GND@2 J$17.GND@3 U65.21 U65.22 U65.24 U65.25 U65.27 U65.28 U65.29 U65.31 U65.33
RFGND17: C72.2 J$18.GND@0 J$18.GND@1 J$18.GND@2 J$18.GND@3 U69.21 U69.22 U69.24 U69.25 U69.27 U69.28 U69.29 U69.31 U69.33
RFGND18: C76.2 J$19.GND@0 J$19.GND@1 J$19.GND@2 J$19.GND@3 U73.21 U73.22 U73.24 U73.25 U73.27 U73.28 U73.29 U73.31 U73.33
RFGND19: C80.2 J$20.GND@0 J$20.GND@1 J$20.GND@2 J$20.GND@3 U77.21 U77.22 U77.24 U77.25 U77.27 U77.28 U77.29 U77.31 U77.33
RFGND20: C84.2 J$21.GND@0 J$21.GND@1 J$21.GND@2 J$21.GND@3 U81.21 U81.22 U81.24 U81.25 U81.27 U81.28 U81.29 U81.31 U81.33
RFGND21: C88.2 J$22.GND@0 J$22.GND@1 J$22.GND@2 J$22.GND@3 U85.21 U85.22 U85.24 U85.25 U85.27 U85.28 U85.29 U85.31 U85.33
RFGND22: C92.2 J$23.GND@0 J$23.GND@1 J$23.GND@2 J$23.GND@3 U89.21 U89.22 U89.24 U89.25 U89.27 U89.28 U89.29 U89.31 U89.33
RFGND23: C96.2 J$24.GND@0 J$24.GND@1 J$24.GND@2 J$24.GND@3 U93.21 U93.22 U93.24 U93.25 U93.27 U93.28 U93.29 U93.31 U93.33
RX: JP1.3 U1.42
RX1: JP6.3 U5.42
RX2: JP11.3 U9.42
RX3: JP16.3 U13.42
RX4: JP21.3 U17.42
RX5: JP26.3 U21.42
RX6: JP31.3 U25.42
RX7: JP36.3 U29.42
RX8: JP41.3 U33.42
RX9: JP46.3 U37.42
RX10: JP51.3 U41.42
RX11: JP56.3 U45.42
RX12: JP61.3 U49.42
RX13: JP66.3 U53.42
RX14: JP71.3 U57.42
RX15: JP76.3 U61.42
RX16: JP81.3 U65.42
RX17: JP86.3 U69.42
RX18: JP91.3 U73.42
RX19: JP96.3 U77.42
RX20: JP101.3 U81.42
RX21: JP106.3 U85.42
RX22: JP111.3 U89.42
RX23: JP116.3 U93.42
TX: JP1.2 U1.44
TX1: JP6.2 U5.44
TX2: JP11.2 U9.44
TX3: JP16.2 U13.44
TX4: JP21.2 U17.44
TX5: JP26.2 U21.44
TX6: JP31.2 U25.44
TX7: JP36.2 U29.44
TX8: JP41.2 U33.44
TX9: JP46.2 U37.44
TX10: JP51.2 U41.44
TX11: JP56.2 U45.44
TX12: JP61.2 U49.44
TX13: JP66.2 U53.44
TX14: JP71.2 U57.44
TX15: JP76.2 U61.44
TX16: JP81.2 U65.44
TX17: JP86.2 U69.44
TX18: JP91.2 U73.44
TX19: JP96.2 U77.44
TX20: JP101.2 U81.44
TX21: JP106.2 U85.44
TX22: JP111.2 U89.44
TX23: JP116.2 U93.44
VBAT: JP3.1 JP5.1 U1.18
VBAT1: JP7.1 JP10.1 U5.18
VBAT2: JP12.1 JP15.1 U9.18
VBAT3: JP17.1 JP20.1 U13.18
VBAT4: JP22.1 JP25.1 U17.18
VBAT5: JP27.1 JP30.1 U21.18
VBAT6: JP32.1 JP35.1 U25.18
VBAT7: JP37.1 JP40.1 U29.18
VBAT8: JP42.1 JP45.1 U33.18
VBAT9: JP47.1 JP50.1 U37.18
VBAT10: JP52.1 JP55.1 U41.18
VBAT11: JP57.1 JP60.1 U45.18
VBAT12: JP62.1 JP65.1 U49.18
VBAT13: JP67.1 JP70.1 U53.18
VBAT14: JP72.1 JP75.1 U57.18
VBAT15: JP77.1 JP80.1 U61.18
VBAT16: JP82.1 JP85.1 U65.18
VBAT17: JP87.1 JP90.1 U69.18
VBAT18: JP92.1 JP95.1 U73.18
VBAT19: JP97.1 JP100.1 U77.18
VBAT20: JP102.1 JP105.1 U81.18
VBAT21: JP107.1 JP110.1 U85.18
VBAT22: JP112.1 JP115.1 U89.18
VBAT23: JP117.1 JP120.1 U93.18
VBATT: JP2.2 U3.1 U3.3
VBATT1: JP8.2 U8.1 U8.3
VBATT2: JP13.2 U12.1 U12.3
VBATT3: JP18.2 U16.1 U16.3
VBATT4: JP23.2 U20.1 U20.3
VBATT5: JP28.2 U24.1 U24.3
VBATT6: JP33.2 U28.1 U28.3
VBATT7: JP38.2 U32.1 U32.3
VBATT8: JP43.2 U36.1 U36.3
VBATT9: JP48.2 U40.1 U40.3
VBATT10: JP53.2 U44.1 U44.3
VBATT11: JP58.2 U48.1 U48.3
VBATT12: JP63.2 U52.1 U52.3
VBATT13: JP68.2 U56.1 U56.3
VBATT14: JP73.2 U60.1 U60.3
VBATT15: JP78.2 U64.1 U64.3
VBATT16: JP83.2 U68.1 U68.3
VBATT17: JP88.2 U72.1 U72.3
VBATT18: JP93.2 U76.1 U76.3
VBATT19: JP98.2 U80.1 U80.3
VBATT20: JP103.2 U84.1 U84.3
VBATT21: JP108.2 U88.1 U88.3
VBATT22: JP113.2 U92.1 U92.3
VBATT23: JP118.2 U96.1 U96.3

## Tracks (layer width: path | path; a pad name or v marks a point on that pad's centre or on a via)
3.3V  (via drill 0.51)
  Top 0.254: 32.89,18.68 32.88,18.67 32.89,18.66 | U4.3 27.81,21.97 29.08,23.24 U4.7 | U4.7 U4.8 | U4.7 32.38,23.24 32.89,22.73 32.89,22.1 | JP1.4 19.05,22.1 21.59,19.56 C2.A 22.74,18.42 R1.2 | C1.1 15.24,10.67 16.51,9.4 17.78,9.4 18.73,10.35 U3.5 | 24,17.31 24,17.02 24.07,17.08 | 24,16.41 U1.2 26.14,16.41 26.8,15.75 31.75,15.75 32.89,16.89 32.89,18.09 U1.36 32.89,18.12 32.89,18.66 | 24,16.41 24,15.11 23.37,14.48 20.83,14.48 20.71,14.36 LED3.A 20.7,12.57 20.07,11.94 19.05,11.94 18.73,11.62 U3.5 | 32.89,22.1 32.93,22.14 C4.1 36.5,20.23 U2.1 | 24.16,17.17 24.07,17.08 | 32.89,22.1 32.89,18.66 | 24,16.41 24,17.16 R1.2 | R1.2 23.9,17.25 24.07,17.08 | U3.5 20.36,10.64 v20.39,10.67
  Bottom 0.254: v20.39,10.67 20.55,10.67 21.31,11.43 JP5.2
3.3V1  (via drill 0.51)
  Top 0.254: 68.45,18.68 68.44,18.67 68.45,18.66 | U7.3 63.37,21.97 64.64,23.24 U7.7 | U7.7 U7.8 | U7.7 67.94,23.24 68.45,22.73 68.45,22.1 | JP6.4 54.61,22.1 57.15,19.56 C6.A 58.3,18.42 R3.2 | C5.1 50.8,10.67 52.07,9.4 53.34,9.4 54.29,10.35 U8.5 | 59.56,17.31 59.56,17.02 59.63,17.08 | 59.56,16.41 U5.2 61.7,16.41 62.36,15.75 67.31,15.75 68.45,16.89 68.45,18.09 U5.36 68.45,18.12 68.45,18.66 | 59.56,16.41 59.56,15.11 58.93,14.48 56.39,14.48 56.27,14.36 LED1.A 56.26,12.57 55.63,11.94 54.61,11.94 54.29,11.62 U8.5 | 68.45,22.1 68.49,22.14 C8.1 72.06,20.23 U6.1 | 59.72,17.17 59.63,17.08 | 68.45,22.1 68.45,18.66 | 59.56,16.41 59.56,17.16 R3.2 | R3.2 59.46,17.25 59.63,17.08 | U8.5 55.92,10.64 v55.95,10.67
  Bottom 0.254: v55.95,10.67 56.11,10.67 56.87,11.43 JP10.2
3.3V2  (via drill 0.51)
  Top 0.254: 104.01,18.68 104,18.67 104.01,18.66 | U11.3 98.93,21.97 100.2,23.24 U11.7 | U11.7 U11.8 | U11.7 103.5,23.24 104.01,22.73 104.01,22.1 | JP11.4 90.17,22.1 92.71,19.56 C10.A 93.86,18.42 R7.2 | C9.1 86.36,10.67 87.63,9.4 88.9,9.4 89.85,10.35 U12.5 | 95.12,17.31 95.12,17.02 95.19,17.08 | 95.12,16.41 U9.2 97.26,16.41 97.92,15.75 102.87,15.75 104.01,16.89 104.01,18.09 U9.36 104.01,18.12 104.01,18.66 | 95.12,16.41 95.12,15.11 94.49,14.48 91.95,14.48 91.83,14.36 LED2.A 91.82,12.57 91.19,11.94 90.17,11.94 89.85,11.62 U12.5 | 104.01,22.1 104.05,22.14 C12.1 107.62,20.23 U10.1 | 95.28,17.17 95.19,17.08 | 104.01,22.1 104.01,18.66 | 95.12,16.41 95.12,17.16 R7.2 | R7.2 95.02,17.25 95.19,17.08 | U12.5 91.48,10.64 v91.51,10.67
  Bottom 0.254: v91.51,10.67 91.67,10.67 92.43,11.43 JP15.2
3.3V3  (via drill 0.51)